# EAGLE board SM2000 (EAGLE 6.5.0)
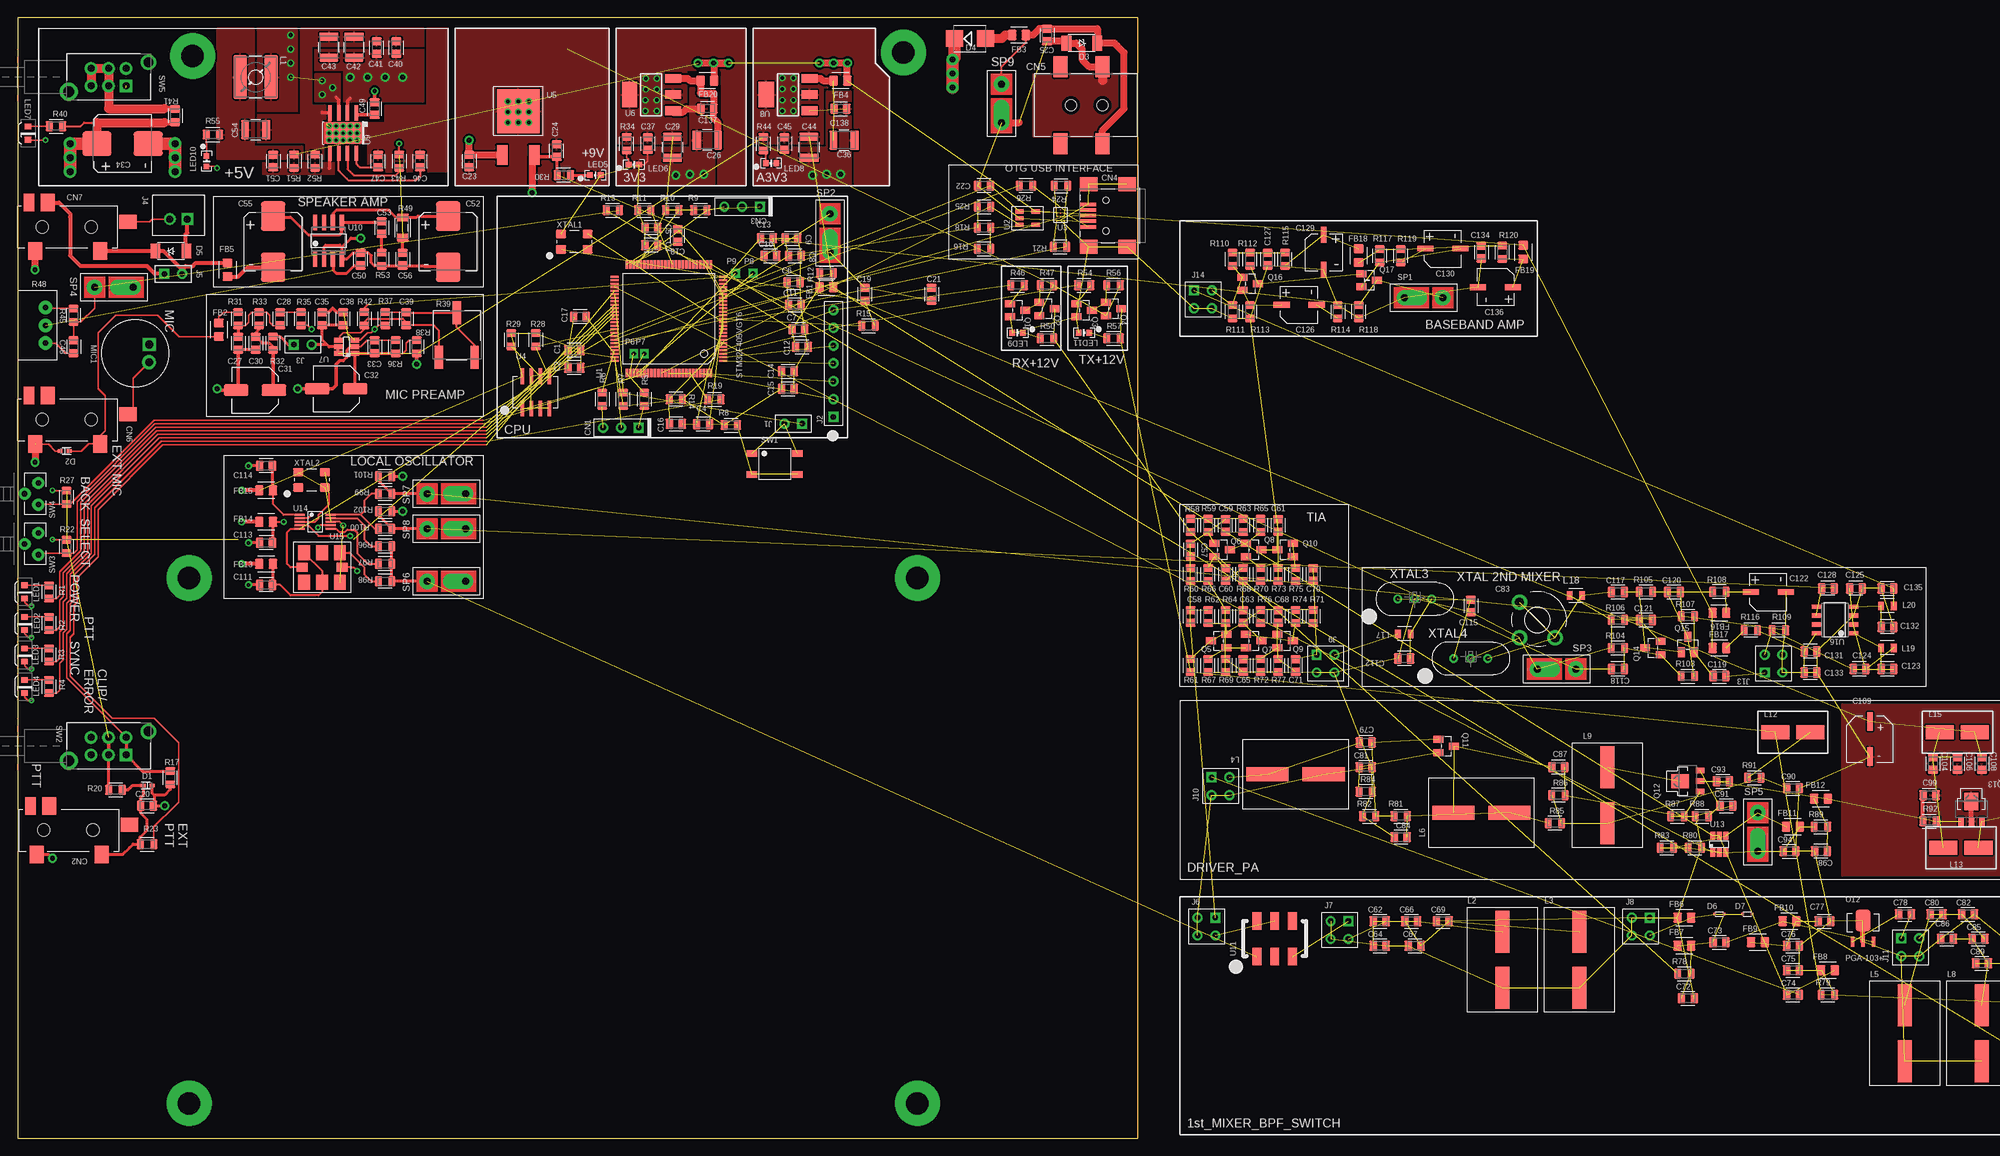
[diagram p0: board, top side]
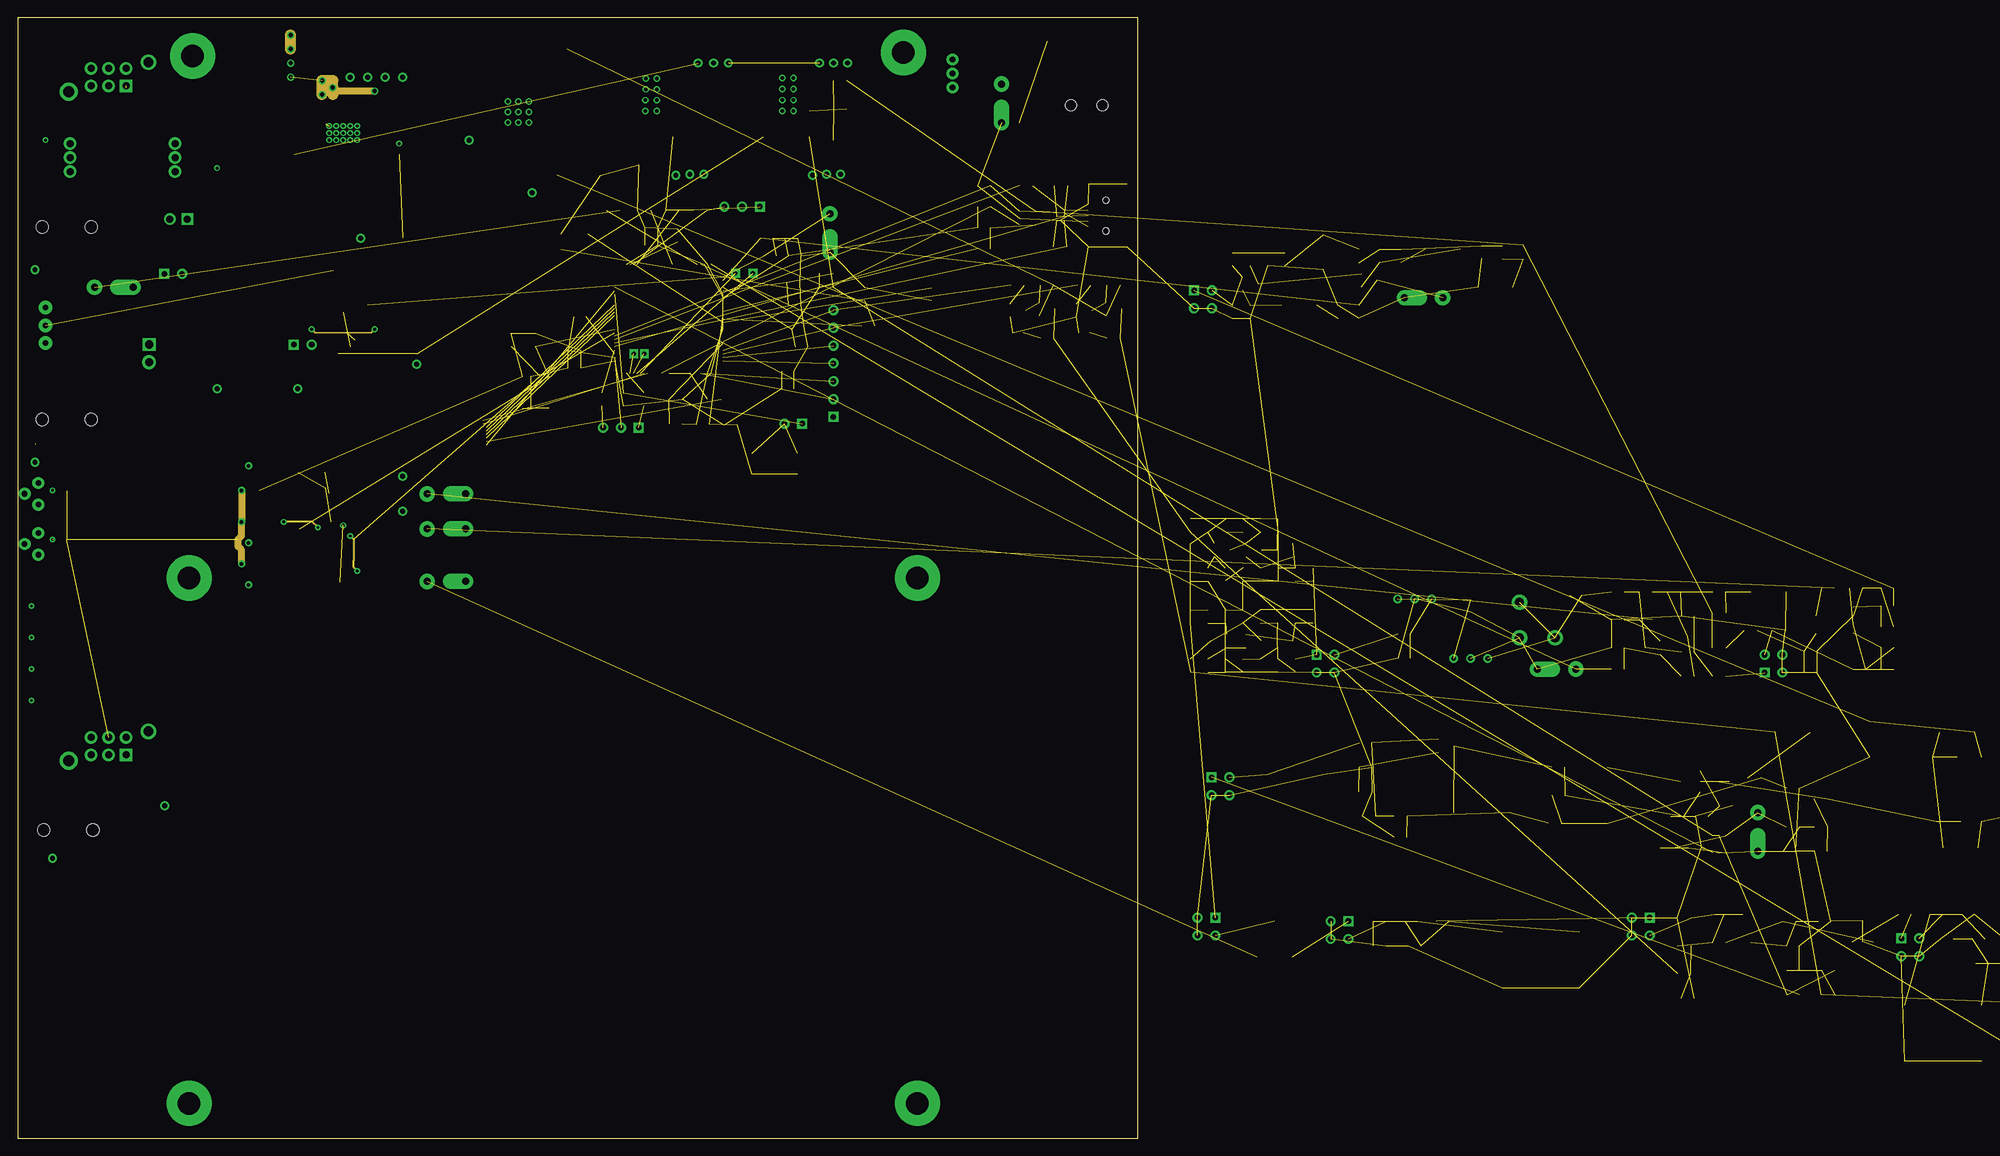
[diagram p1: board, inner layer L2-BOTTOM]
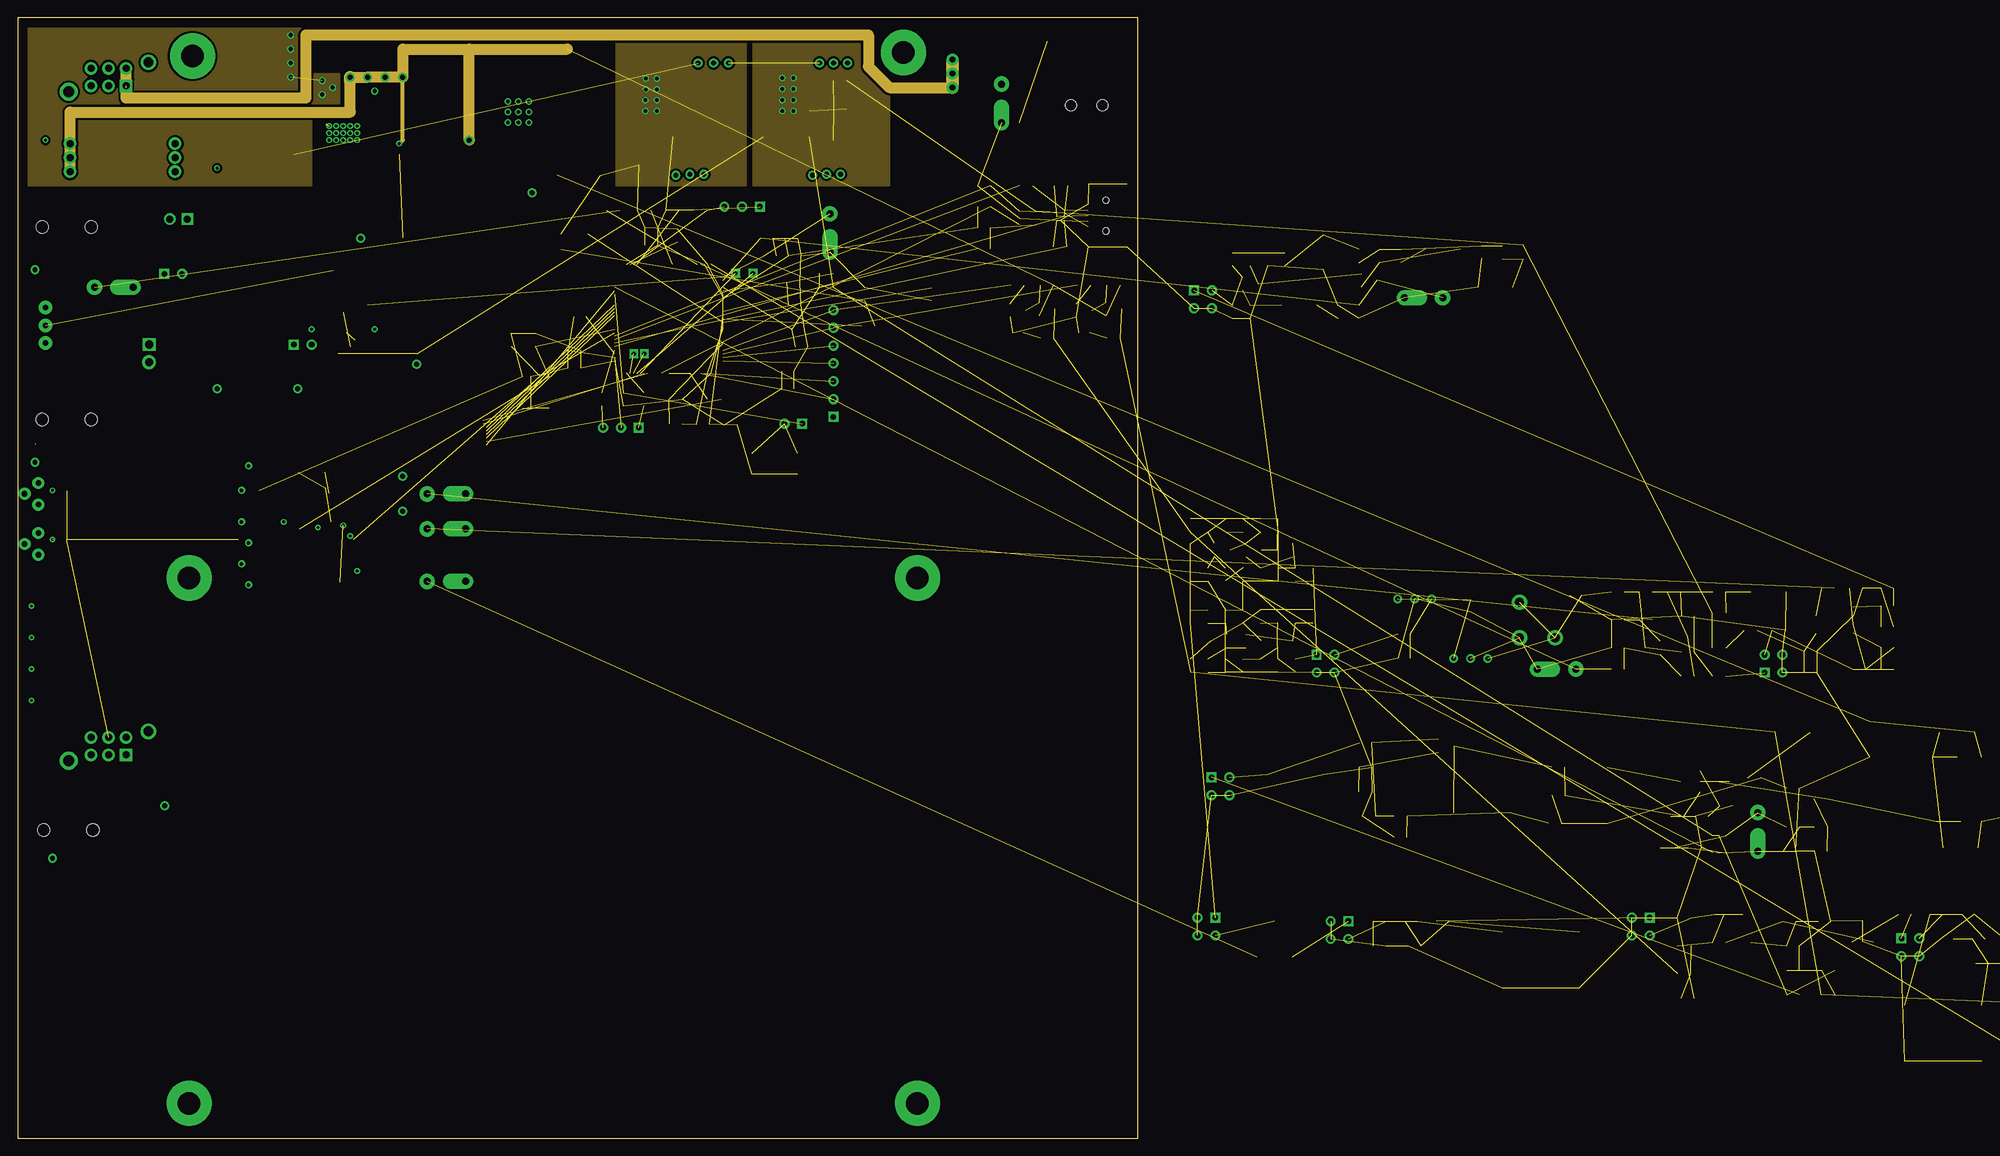
[diagram p2: board, inner layer L3-VDD]
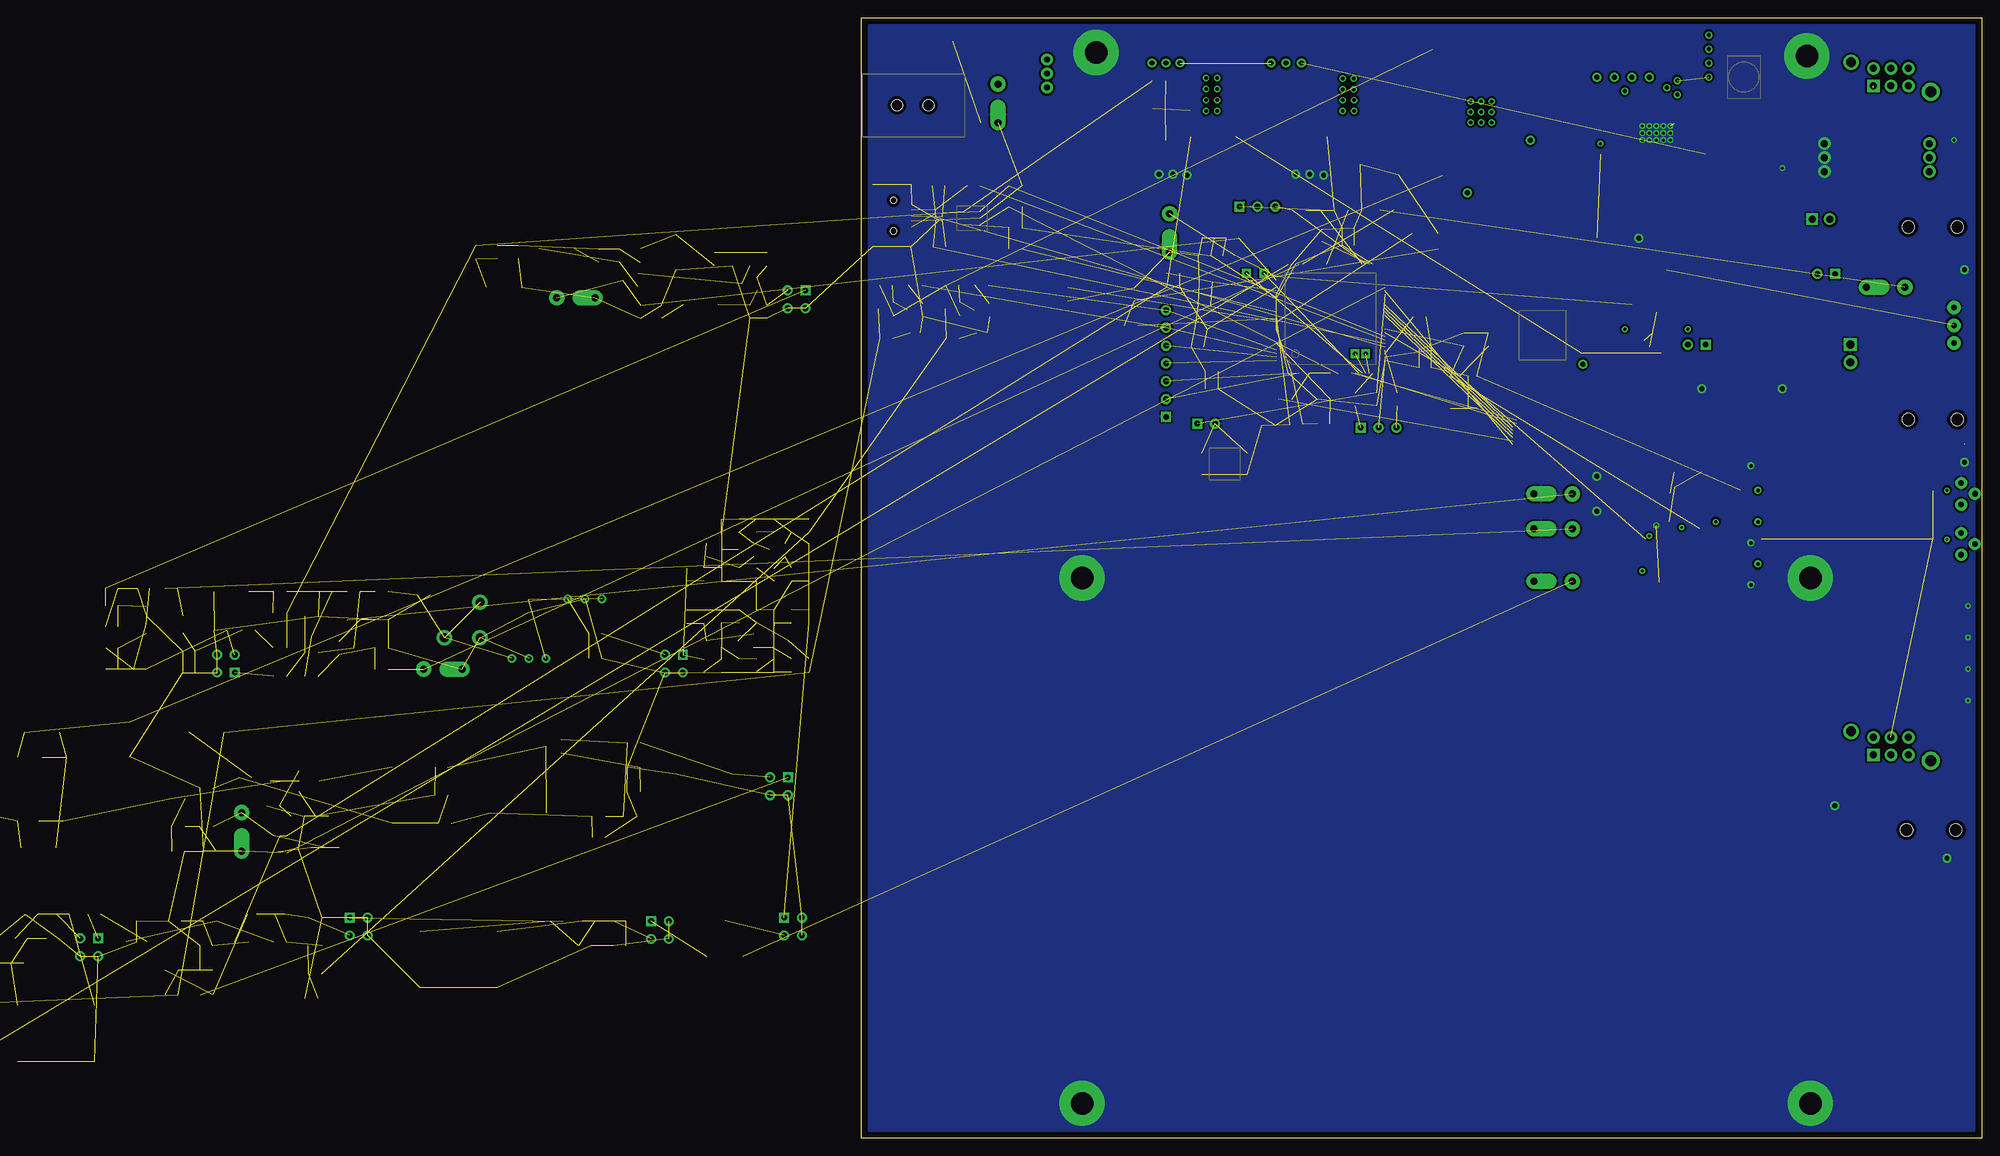
[diagram p3: board, bottom side, seen from below]

Size 160 x 160 mm. Coordinates in mm from the lower left corner, seen from the top.
Outline: 0,0 160,0 160,160 0,160 0,0
Copper layers (1*2+3*16): L1-TOP 0.035mm / dielectric 0.25mm / L2-BOTTOM 0.035mm / dielectric 1mm / L3-VDD 0.035mm / dielectric 0.25mm / L4-GND 0.035mm
Design rules "default *": minimum track width 0.2mm, minimum drill 0.4mm, track to track 0.2mm, track to pad 0.2mm, pad to pad 0.2mm, via to via 0.2mm, smd to smd 0.2mm, copper to edge 0.5mm, drill to drill 0.15mm, minimum pad ring 0.25mm, minimum via ring 0.2mm, stop-mask expansion 0.1mm, vias tented up to drill 0mil, thermal gap 0.25mm

## Footprints (pad centres in the part's own frame; a part is rotated, then mirrored left to right if it is on the bottom)
C0805 = smd 1.15 x 1.45: 1 -0.9,0; 2 0.9,0
C1210 = smd 1.15 x 2.7: 1 -1.5,0; 2 1.5,0
NICHICON-WX-6.3 = smd 1.6 x 3.5: 1 0,2.7; 2 0,-2.7
CAP-CHEMI-HA0 = smd 3.5 x 4.2: 1 0,3.65; 2 0,-3.65
TRIMCAP_VAR_2222_V = drill 1.3 pad 2.184: R1 -2.54,2.54; R2 2.54,-2.54; S -2.54,-2.54
CAP-CHEMI-F80 = smd 0.8 x 2.65: 1 0,2.5; 2 0,-2.5
NICHICON-WJ-5 = smd 0.8 x 2.3: 1 0,2.5; 2 0,-2.5
HDR100-3 = drill 0.8 pad 1.422 square: 1 0,0 | drill 0.8 pad 1.422: 2 2.54,0; 3 5.08,0
ST-3509 = smd 2 x 2.5: A 4.75,3.45; B 2.95,-3.45; C -4.5,3.45 | smd 2.5 x 2: D -8.5,-0.75 | smd 1.5 x 2.5: F 5.65,-3.45 | hole 1.8: 3.75,0; -3.25,0
JI-MU3-002 = smd 0.5 x 2.3: 1 1.6,-2.85; 2 0.8,-2.85; 3 0,-2.85; 4 -0.8,-2.85; 5 -1.6,-2.85 | smd 2 x 2.5: 6 4.45,-2.75; 7 -4.45,-2.75; 8 4.45,2.75; 9 -4.45,2.75 | hole 0.9: -2.2,-0.25; 2.2,-0.25
DS-0518 = smd 2 x 3: 1 -3,5.5; 2 -3,-5.5; 3 3,-5.5; 4 3,5.5 | hole 1.6: -3,0; 1.5,0
SOD523 = smd 0.7 x 0.5: A 0.7,0; C -0.6,0
SOD128 = smd 1.4 x 2.1: A 2.2,0; C -2.2,0
SMB = smd 2.4 x 2.4: A 2.2,0; C -2.2,0
SC79_INFINEON = smd 0.35 x 0.35: A 0.675,0; C -0.675,0
SOT23 = smd 1 x 1.4: 1 -0.95,-1.1; 2 0.95,-1.1; 3 0,1.1
FE0805 = smd 1.28 x 1.47: 1 -0.975,0; 2 0.975,0
JMPR-2PIN = drill 0.8 pad 1.422 square: 1 0,1.27 | drill 0.8 pad 1.422: 2 0,-1.27
HDR100-7 = drill 0.8 pad 1.422 square: 1 0,0 | drill 0.8 pad 1.422: 2 2.54,0; 3 5.08,0; 4 7.62,0; 5 10.16,0; 6 12.7,0; 7 15.24,0
CONN-BOOM-XH-2A = drill 1 pad 1.676 square: 1 -1.25,0 | drill 1 pad 1.676: 2 1.25,0
JMPR-2X2X.1 = drill 0.8 pad 1.422 square: 1 2.54,0 | drill 0.8 pad 1.422: 2 2.54,-2.54; 3 0,0; 4 0,-2.54
SRR5028 = smd 1.9 x 6.3: 1 -2.2,0; 2 2.2,0
L10X15 = smd 2 x 6: 1 0,4; 2 0,-4
Z15/4 = smd 4 x 2: 1 -2.5,0; 2 2.5,0
L-TDK-MLF2012 = smd 1.2 x 0.8: P$1 0,0.9; P$2 0,-0.9
LTST-S2200K = smd 0.9 x 0.8: A 0,0.95; C 0,-0.95
SML-LX0603SRW = smd 0.8 x 0.8: A 0.75,0; C -0.75,0
CMA-4544PF-W = drill 1.2 pad 1.93: 1 -2,1.27 | drill 1.2 square: 2 -2,-1.27
TPAD50 = drill 0.6 pad 1.27 square: 1 0,0
SOT89 = smd 0.8 x 1.2: 1 -1.499,-1.75; 2 0.001,-1.75; 3 1.499,-1.75 | smd 2 x 2.5: 4 0,1.1
R0805 = smd 1.05 x 1.4: 1 -0.95,0; 2 0.95,0
POT3361 = smd 1.19 x 3.3: 1 -2.54,-3.2; 2 0,3.2; 3 2.54,-3.2
POT-3310C = drill 0.8 pad 1.93: 1 -3.91,-2.54; 2 -3.91,0; 3 -3.91,2.54
R1206 = smd 1.1 x 1.7: 1 -1.45,0; 2 1.45,0
SCOPE_PAD = drill 1 pad 2.184: 1 0,1.5 | drill 1 pad 2.184 offset: 2 0,-4
TS-02B = smd 1.5 x 0.9: 1 -3.25,1.5; 2 3.25,1.5; 3 -3.25,-1.5; 4 3.25,-1.5
SW-LC2259 = drill 1 pad 1.778 square: 1 2.5,-1.25 | drill 1 pad 1.778: 2 0,-1.25; 3 -2.5,-1.25; 4 2.5,1.25; 5 0,1.25; 6 -2.5,1.25 | drill 1.6 pad 2.54: 7 -5.7,-2.1 | drill 1.4 pad 2.184: 8 5.7,2.1
TS-026 = drill 0.8 pad 1.676: 1 -1.55,-0.975; 2 1.55,-0.975; 3 0,0.975
LQFP100-14 = smd 0.3 x 1.2: 1 -6,-7.75; 2 -5.5,-7.75; 3 -5,-7.75; 4 -4.5,-7.75; 5 -4,-7.75; 6 -3.5,-7.75; 7 -3,-7.75; 8 -2.5,-7.75; 9 -2,-7.75; 10 -1.5,-7.75; 11 -1,-7.75; 12 -0.5,-7.75; 13 0,-7.75; 14 0.5,-7.75; 15 1,-7.75; 16 1.5,-7.75; 17 2,-7.75; 18 2.5,-7.75; 19 3,-7.75; 20 3.5,-7.75; 21 4,-7.75; 22 4.5,-7.75; 23 5,-7.75; 24 5.5,-7.75; 25 6,-7.75; 51 6,7.75; 52 5.5,7.75; 53 5,7.75; 54 4.5,7.75; 55 4,7.75; 56 3.5,7.75; 57 3,7.75; 58 2.5,7.75; 59 2,7.75; 60 1.5,7.75; 61 1,7.75; 62 0.5,7.75; 63 0,7.75; 64 -0.5,7.75; 65 -1,7.75; 66 -1.5,7.75; 67 -2,7.75; 68 -2.5,7.75; 69 -3,7.75; 70 -3.5,7.75; 71 -4,7.75; 72 -4.5,7.75; 73 -5,7.75; 74 -5.5,7.75; 75 -6,7.75 | smd 1.2 x 0.3: 26 7.75,-6; 27 7.75,-5.5; 28 7.75,-5; 29 7.75,-4.5; 30 7.75,-4; 31 7.75,-3.5; 32 7.75,-3; 33 7.75,-2.5; 34 7.75,-2; 35 7.75,-1.5; 36 7.75,-1; 37 7.75,-0.5; 38 7.75,0; 39 7.75,0.5; 40 7.75,1; 41 7.75,1.5; 42 7.75,2; 43 7.75,2.5; 44 7.75,3; 45 7.75,3.5; 46 7.75,4; 47 7.75,4.5; 48 7.75,5; 49 7.75,5.5; 50 7.75,6; 76 -7.75,6; 77 -7.75,5.5; 78 -7.75,5; 79 -7.75,4.5; 80 -7.75,4; 81 -7.75,3.5; 82 -7.75,3; 83 -7.75,2.5; 84 -7.75,2; 85 -7.75,1.5; 86 -7.75,1; 87 -7.75,0.5; 88 -7.75,0; 89 -7.75,-0.5; 90 -7.75,-1; 91 -7.75,-1.5; 92 -7.75,-2; 93 -7.75,-2.5; 94 -7.75,-3; 95 -7.75,-3.5; 96 -7.75,-4; 97 -7.75,-4.5; 98 -7.75,-5; 99 -7.75,-5.5; 100 -7.75,-6
SOT23-5L = smd 0.6 x 1.2: 1 0.95,1.15; 2 0,1.15; 3 -0.95,1.15; 4 -0.95,-1.15; 5 0.95,-1.15
ECOPACK-11 = smd 0.25 x 0.25: A2 0,0.75; A3 0.5,0.75; B1 -0.5,0.25; B2 0,0.25; B3 0.5,0.25; C1 -0.5,-0.25; C2 0,-0.25; C3 0.5,-0.25; D1 -0.5,-0.75; D2 0,-0.75; D3 0.5,-0.75
SOIC8 = smd 0.5 x 2.25: 1 -1.9,-2.3; 2 -0.63,-2.3; 3 0.64,-2.3; 4 1.91,-2.3; 5 1.91,2.3; 6 0.64,2.3; 7 -0.63,2.3; 8 -1.9,2.3
DPAK = smd 1.5 x 2.8: 1 -2.3,-3.125; 3 2.3,-3.125 | smd 6.1 x 6.3: 4 0,3.125
SOT223 = smd 1.219 x 2.235: 1 -2.311,-3.099; 2 0,-3.099; 3 2.311,-3.099 | smd 3.6 x 2.2: 4 0,3.099
SOT23-6 = smd 0.7 x 1.2: 1 -0.95,-1.2; 2 0,-1.2; 3 0.95,-1.2; 4 0.95,1.2; 5 0,1.2; 6 -0.95,1.2
PSO-DDA = smd 2.2 x 0.5: 1 -2.875,1.905; 2 -2.875,0.635; 3 -2.875,-0.635; 4 -2.875,-1.905; 5 2.875,-1.905; 6 2.875,-0.635; 7 2.875,0.635; 8 2.875,1.905 | smd 2.95 x 4.9: EP 0,0
SO08 = smd 0.6 x 2.2: 1 -1.905,-2.6; 2 -0.635,-2.6; 3 0.635,-2.6; 4 1.905,-2.6; 5 1.905,2.6; 6 0.635,2.6; 7 -0.635,2.6; 8 -1.905,2.6
ADE-1 = smd 1.27 x 2.54: 1 -2.54,-2.54; 2 0,-2.54; 3 2.54,-2.54; 4 2.54,2.54; 5 0,2.54; 6 -2.54,2.54
DF782 = smd 0.711 x 1.473: 1 -1.499,-1.918; 2 0,-1.918; 3 1.499,-1.918 | smd 2.159 x 3.175: 4 0,1.092
MSOP10 = smd 0.3 x 1.4: 1 -1,-2.2; 2 -0.5,-2.2; 3 0,-2.2; 4 0.5,-2.2; 5 1,-2.2; 6 1,2.2; 7 0.5,2.2; 8 0,2.2; 9 -0.5,2.2; 10 -1,2.2
SI570 = smd 1.7 x 2.15: 1 -2.54,-2.1; 2 0,-2.1; 3 2.54,-2.1; 4 2.54,2.1; 5 0,2.1; 6 -2.54,2.1 | smd 1.545 x 1.3: 7 -2.853,0; 8 2.853,0
SO-08 = smd 0.6 x 1.3: 1 -1.905,-2.65; 2 -0.635,-2.65; 3 0.635,-2.65; 4 1.905,-2.65; 5 1.905,2.65; 6 0.635,2.65; 7 -0.635,2.65; 8 -1.905,2.65
BU-SMA-H = drill 1.27: 1 0,0 | drill 1.778: 2 -2.55,2.55; 3 2.55,2.55; 4 2.55,-2.55; 5 -2.55,-2.55
CTS-405 = smd 1.5 x 1.2: 1 -1.9,-1.1; 2 1.9,-1.1; 3 1.9,1.1; 4 -1.9,1.1
HC49U = drill 0.7 pad 1.2: 1 -2.44,0; 2 -0.027,0; 3 2.44,0

## Placement (x,y rotation side)
C1  100nF,25V  [C0805]  79.5,112.5 180 top
C2  10nF,25V  [C0805]  79.5,110 180 top
C3  100nF,25V  [C0805]  90.5,127.5 180 top
C4  100nF,25V  [C0805]  97.89,101.96 180 top
C5  10nF,25V  [C0805]  90.5,130 180 top
C6  1uF,25V  [C0805]  110.81,122.23 0 top
C7  1uF,25V  [C0805]  111.5,115.5 0 top
C8  100nF,25V  [C0805]  111,126 0 top
C9  10nF,25V  [C0805]  110.5,128.5 0 top
C10  1nF,25V  [C0805]  107.5,126 0 top
C11  100nF,25V  [C0805]  111,119 0 top
C12  100nF,25V  [C0805]  112,113 0 top
C13  1nF,25V  [C0805]  107,128.5 0 top
C14  100nF,25V  [C0805]  110,109.5 0 top
C15  10nF,25V  [C0805]  110,107 0 top
C16  1uF,25V  [C0805]  94,102 0 top
C17  2.2uF,25V  [C0805]  80.31,117.27 180 top
C18  2.2uF,25V  [C0805]  94.27,128.88 90 top
C19  20pF,50V  [C0805]  121,120.5 90 top
C20  100nF,25V  [C0805]  18.5,47.5 0 top
C21  20pF,50V  [C0805]  130.5,120.5 270 top
C22  4.7uF,25V  [C0805]  138,136 180 top
C23  .33uF,25V  [C0805]  64.5,139.5 270 top
C24  100nF,25V  [C0805]  77,141 90 top
C25  10nF,25V  [C0805]  147,157.5 270 top
C26  22uF,25V  [C1210]  98.5,142.5 180 top
C27  1nF,25V  [C0805]  31.5,113.5 270 top
C28  220nF,25V  [C0805]  37.5,117 90 top
C29  22uF,25V  [C1210]  93.5,141.5 270 top
C30  100nF,25V  [C0805]  34,113.5 270 top
C31  100uF,6.3V,EL  [NICHICON-WX-6.3]  33.91,106.81 270 top
C32  100uF,6.3V,EL  [NICHICON-WX-6.3]  45.5,107 270 top
C33  100nF,25V  [C0805]  51,113 270 top
C34  220uF,25V  [CAP-CHEMI-HA0]  15,142 90 top
C35  100nF,25V  [C0805]  43.5,117 90 top
C36  22uF,25V  [C1210]  118,142.5 0 top
C37  100nF,25V  [C0805]  90,142 270 top
C38  2.2uF,25V  [C0805]  46.5,117 90 top
C39  100pF,50V  [C0805]  55.5,117 270 top
C40  1nF,25V  [C0805]  54.1,155.7 90 top
C41  100nF,25V  [C0805]  51.3,155.7 90 top
C42  22uF,25V  [C1210]  48.07,155.77 90 top
C43  22uF,25V  [C1210]  44.47,155.77 90 top
C44  22uF,25V  [C1210]  113,141.5 270 top
C45  100nF,25V  [C0805]  109.5,142 270 top
C46  470nF,25V  [C0805]  57.5,139.5 90 top
C47  8.2nF,25V  [C0805]  51.5,139.5 90 top
C48  100nF,25V  [C0805]  8,113 270 top
C49  100nF,25V  [C0805]  51,147 90 top
C50  3.9nF,25V  [C0805]  49,125.5 90 top
C51  20pF,50V  [C0805]  36.5,139.5 270 top
C52  220uF,25V  [CAP-CHEMI-HA0]  61.5,128 0 top
C53  47nF,25V  [C0805]  52,130 270 top
C54  22uF,25V  [C1210]  34,144 0 top
C55  220uF,25V  [CAP-CHEMI-HA0]  36.5,128 0 top
C56  100nF,25V  [C0805]  55,125.5 270 top
C57  100nF,25V  [C0805]  167.5,84 270 top  (outside the outline)
C58  100nF,25V  [C0805]  167.5,74.5 90 top  (outside the outline)
C59  100nF,25V  [C0805]  172.5,87.5 90 top  (outside the outline)
C60  100nF,25V  [C0805]  172.5,80.5 270 top  (outside the outline)
C61  100nF,25V  [C0805]  180,87.5 270 top  (outside the outline)
C62  3.3pF,50V  [C0805]  194.5,31 0 top  (outside the outline)
C63  100nF,25V  [C0805]  175,74.5 90 top  (outside the outline)
C64  12pF,50V  [C0805]  194.5,27.5 0 top  (outside the outline)
C65  100nF,25V  [C0805]  175,67.5 270 top  (outside the outline)
C66  0.5pF,50V  [C0805]  199,31 0 top  (outside the outline)
C67  12pF,50V  [C0805]  199.5,27.5 0 top  (outside the outline)
C68  100nF,25V  [C0805]  180,74.5 270 top  (outside the outline)
C69  3.3pF,50V  [C0805]  203.5,31 0 top  (outside the outline)
C70  100nF,25V  [C0805]  185,80.5 270 top  (outside the outline)
C71  100nF,25V  [C0805]  182.5,67.5 90 top  (outside the outline)
C72  1nF,25V  [C0805]  238.5,20 0 top  (outside the outline)
C73  1nF,25V  [C0805]  243,28 0 top  (outside the outline)
C74  1nF,25V  [C0805]  253.5,20.5 0 top  (outside the outline)
C75  1nF,25V  [C0805]  253.5,24 0 top  (outside the outline)
C76  1nF,25V  [C0805]  253.5,27.5 0 top  (outside the outline)
C77  1uF,25V  [C0805]  258,31 0 top  (outside the outline)
C78  1nF,25V  [C0805]  269.5,32 0 top  (outside the outline)
C79  22pF,50V  [C0805]  192.5,56.5 180 top  (outside the outline)
C80  3.3pF,50V  [C0805]  274,32 0 top  (outside the outline)
C81  1nF,25V  [C0805]  192.5,53 0 top  (outside the outline)
C82  12pF,50V  [C0805]  278.5,32 0 top  (outside the outline)
C83  2-12pF  [TRIMCAP_VAR_2222_V]  217,74 0 top  (outside the outline)
C84  100nF,25V  [C0805]  197.5,43 180 top  (outside the outline)
C85  0.5pF,50V  [C0805]  280,28.5 0 top  (outside the outline)
C86  12pF,50V  [C0805]  275.5,28.5 0 top  (outside the outline)
C87  5.6pF,50V  [C0805]  220,53 180 top  (outside the outline)
C89  3.3pF,50V  [C0805]  280.5,25 0 top  (outside the outline)
C90  100nF,25V  [C0805]  253.5,50 0 top  (outside the outline)
C91  1nF,25V  [C0805]  244,47.5 0 top  (outside the outline)
C92  22pF,50V  [C0805]  285.5,25 0 top  (outside the outline)
C93  22pF,50V  [C0805]  243.5,51 0 top  (outside the outline)
C94  100nF,25V  [C0805]  253,41 0 top  (outside the outline)
C95  22pF,50V  [C0805]  285.5,32 0 top  (outside the outline)
C96  1nF,25V  [C0805]  300.5,22 0 top  (outside the outline)
C97  1nF,25V  [C0805]  300.5,3 0 top  (outside the outline)
C98  1nF,25V  [C0805]  257.5,41 180 top  (outside the outline)
C99  1nF,25V,DNL  [C0805]  273,49 0 top  (outside the outline)
C100  1nF,25V  [C0805]  302.5,28.5 0 top  (outside the outline)
C101  1pF,50V  [C0805]  300.5,7 0 top  (outside the outline)
C102  1nF,25V  [C0805]  289.5,47 0 top  (outside the outline)
C103  1nF,25V  [C0805]  300.5,18.5 0 top  (outside the outline)
C104  100nF,25V  [C0805]  273.5,53.5 270 top  (outside the outline)
C105  33pF,50V  [C0805]  297.5,46 0 top  (outside the outline)
C106  1nF,25V  [C0805]  277,53.5 270 top  (outside the outline)
C107  47pF,50V  [C0805]  300.5,50 270 top  (outside the outline)
C108  100nF,25V  [C0805]  280.5,53.5 270 top  (outside the outline)
C109  100uF,25V,EL  [CAP-CHEMI-F80]  264.5,57 0 top  (outside the outline)
C110  33pF,50V  [C0805]  309,50.5 0 top  (outside the outline)
C111  100nF,25V  [C0805]  35.5,79 180 top
C112  39pF,50V  [C0805]  198,68.5 180 top  (outside the outline)
C113  100nF,25V  [C0805]  35.5,85 180 top
C114  100nF,25V  [C0805]  35.5,96 180 top
C115  5.6pF,50V  [C0805]  207.5,76 270 top  (outside the outline)
C117  100nF,25V  [C0805]  228.5,78 0 top  (outside the outline)
C118  100nF,25V  [C0805]  228.5,67 180 top  (outside the outline)
C119  100nF,25V  [C0805]  243,66 0 top  (outside the outline)
C120  100nF,25V  [C0805]  236.5,78 0 top  (outside the outline)
C121  100nF,25V  [C0805]  232.5,74 0 top  (outside the outline)
C122  10uF,25V,EL  [NICHICON-WJ-5]  250,78 90 top  (outside the outline)
C123  27pF,50V  [C0805]  267,67 180 top  (outside the outline)
C124  150pF,50V  [C0805]  263,67 180 top  (outside the outline)
C125  100nF,25V  [C0805]  262.5,78.5 180 top  (outside the outline)
C126  10uF,25V,EL  [NICHICON-WJ-5]  183,119 90 top  (outside the outline)
C127  100nF,25V  [C0805]  178.5,125.5 270 top  (outside the outline)
C128  150pF,50V  [C0805]  258.5,78.5 180 top  (outside the outline)
C129  10uF,25V,EL  [NICHICON-WJ-5]  186.5,126.5 0 top  (outside the outline)
C130  10uF,25V,EL  [NICHICON-WJ-5]  203.5,127 90 top  (outside the outline)
C131  1nF,25V  [C0805]  256,69.5 180 top  (outside the outline)
C132  1nF,25V  [C0805]  267,73 180 top  (outside the outline)
C133  100nF,25V  [C0805]  256,66.5 180 top  (outside the outline)
C134  100nF,25V  [C0805]  209,126.5 270 top  (outside the outline)
C135  1nF,25V  [C0805]  267,78.5 0 top  (outside the outline)
C136  10uF,25V,EL  [NICHICON-WJ-5]  211,121.5 270 top  (outside the outline)
C137  100nF,25V  [C0805]  98.5,147 180 top
C138  100nF,25V  [C0805]  117.5,147 0 top
CN1  HDR100-3  [HDR100-3]  88.69,101.45 180 top
CN2  ST-3509  [ST-3509]  7.5,44 180 top
CN3  HDR100-3  [HDR100-3]  106,133 180 top
CN4  JS-MU3-002  [JI-MU3-002]  155.68,131.72 270 top
CN5  DS-0518  [DS-0518]  151.93,147.48 180 top
CN6  ST-3509  [ST-3509]  7.28,102.59 180 top
CN7  ST-3509  [ST-3509]  7.28,130.12 180 top
D1  DNL  [SOD523]  18.54,50.4 0 top
D2  DNL  [SOD523]  6.77,98.1 180 top
D3  PTVS20VP1UP  [SOD128]  151.97,156.34 180 top
D4  B330B  [SMB]  136,157 0 top
D5  DNL  [SOD128]  21.91,126.66 0 top
D6  BAR64-02V  [SC79_INFINEON]  243,32 0 top  (outside the outline)
D7  BAR64-02V  [SC79_INFINEON]  247,32 0 top  (outside the outline)
D8  BAR64-02V  [SC79_INFINEON]  285,28 0 top  (outside the outline)
D9  BAR64-02V  [SC79_INFINEON]  296.5,22 0 top  (outside the outline)
D10  BAT18  [SOT23]  305.5,5 0 top  (outside the outline)
FB1  FB0805  [FE0805]  115.5,121.5 180 top
FB2  FB0805  [FE0805]  28.75,115.43 90 top
FB3  FB0805  [FE0805]  143,157.5 180 top
FB4  FB0805  [FE0805]  117.5,151 180 top
FB5  FB0805  [FE0805]  30,124 90 top
FB6  FB0805  [FE0805]  238,31.5 0 top  (outside the outline)
FB7  FB0805  [FE0805]  238,27.5 0 top  (outside the outline)
FB8  FB0805  [FE0805]  258.5,24 0 top  (outside the outline)
FB9  FB0805  [FE0805]  248.5,28 0 top  (outside the outline)
FB10  FB0805  [FE0805]  253,31 0 top  (outside the outline)
FB11  FB0805  [FE0805]  253.5,44.5 0 top  (outside the outline)
FB12  FB0805  [FE0805]  257.5,48.5 0 top  (outside the outline)
FB13  FB0805  [FE0805]  35.5,82 0 top
FB14  FB0805  [FE0805]  35.5,88 0 top
FB15  FB0805  [FE0805]  35.5,92.5 0 top
FB16  FB0805  [FE0805]  243,75 180 top  (outside the outline)
FB17  FB0805  [FE0805]  243,70 0 top  (outside the outline)
FB18  FB0805  [FE0805]  191.5,126 270 top  (outside the outline)
FB19  FB0805  [FE0805]  215,126.5 90 top  (outside the outline)
FB20  FB0805  [FE0805]  98.5,151 180 top
J1  JMP-2PIN  [JMPR-2PIN]  110.77,102.02 270 top
J2  HDR100-7  [HDR100-7]  116.5,103 90 top
J3  JMP-2PIN  [JMPR-2PIN]  40.73,113.32 90 top
J4  CONN-BOOM-XH-2A  [CONN-BOOM-XH-2A]  23,131.23 180 top
J5  JMP-2PIN  [JMPR-2PIN]  22.23,123.4 90 top
J6  JMPR-2X2  [JMPR-2X2X.1]  168.5,31.5 0 top  (outside the outline)
J7  JMPR-2X2  [JMPR-2X2X.1]  187.5,31 0 top  (outside the outline)
J8  JMPR-2X2  [JMPR-2X2X.1]  230.5,31.5 0 top  (outside the outline)
J9  JMPR-2X2  [JMPR-2X2X.1]  185.5,66.5 90 top  (outside the outline)
J10  JMPR-2X2  [JMPR-2X2X.1]  170.5,49 90 top  (outside the outline)
J11  JMPR-2X2  [JMPR-2X2X.1]  269,26 90 top  (outside the outline)
J12  JMPR-2X2  [JMPR-2X2X.1]  314,51.5 90 top  (outside the outline)
J13  JMPR-2X2  [JMPR-2X2X.1]  252,66.5 180 top  (outside the outline)
J14  JMPR-2X2  [JMPR-2X2X.1]  168,118.5 90 top  (outside the outline)
L1  4.2uH  [SRR5028]  34,151.5 180 top
L2  68nH  [L10X15]  212,25.5 0 top  (outside the outline)
L3  68nH  [L10X15]  223,25.5 0 top  (outside the outline)
L4  57nH  [L10X15]  182.5,52 90 top  (outside the outline)
L5  68nH  [L10X15]  269.5,15 0 top  (outside the outline)
L6  168nH  [L10X15]  209,46.5 270 top  (outside the outline)
L8  68nH  [L10X15]  280.5,15 0 top  (outside the outline)
L9  54nH  [L10X15]  227,49 180 top  (outside the outline)
L10  53nH 3T 5mm ID  [L10X15]  294,25.5 0 top  (outside the outline)
L11  220nH  [L10X15]  313,24 0 top  (outside the outline)
L12  RFC  [Z15/4]  253.5,58 0 top  (outside the outline)
L13  RFC  [Z15/4]  277.5,41.5 0 top  (outside the outline)
L14  57nH  [L10X15]  293.5,50 180 top  (outside the outline)
L15  RFC  [Z15/4]  277,58 0 top  (outside the outline)
L16  57nH  [L10X15]  304,54 90 top  (outside the outline)
L17  5.7uH  [L-TDK-MLF2012]  198,72 90 top  (outside the outline)
L18  L-TDK-MLF-2012-9.2uH  [L-TDK-MLF2012]  222.5,77.5 270 top  (outside the outline)
L19  5.2uH  [L-TDK-MLF2012]  267,70 90 top  (outside the outline)
L20  15uH,TDK,MLF  [L-TDK-MLF2012]  267,76 90 top  (outside the outline)
LED1  LTST-S220KGKT  [LTST-S2200K]  1,78 0 top
LED2  LTST-S220KRKT  [LTST-S2200K]  1,73.5 0 top
LED3  LTST-S220KGKT  [LTST-S2200K]  1,69 0 top
LED4  LTST-S220KRKT  [LTST-S2200K]  1,64.5 0 top
LED5  SML-LX0603GW  [SML-LX0603SRW]  82.5,137.5 180 top
LED6  SML-LX0603GW  [SML-LX0603SRW]  88,139 180 top
LED7  LTST-S220KGKT  [LTST-S2200K]  1.5,143.5 0 top
LED8  SML-LX0603GW  [SML-LX0603SRW]  107.6,139.2 180 top
LED9  SML-LX0603SRW  [SML-LX0603SRW]  142.8,115 0 top
LED10  SML-LX0603GW  [SML-LX0603SRW]  27,139.5 90 top
LED11  SML-LX0603YW  [SML-LX0603SRW]  152.3,115 0 top
MIC1  CMA-4544PF-W  [CMA-4544PF-W]  16.8,112.06 180 top
P6  TPAD50  [TPAD50]  88,112 0 top
P7  TPAD50  [TPAD50]  89.5,112 0 top
P8  TPAD50  [TPAD50]  105,123.5 0 top
P9  TPAD50  [TPAD50]  102.5,123.5 0 top
PCB1  SM2000A  [NOPACKAGE]  -0.94,1.35 0 top
Q1  MMBT3904  [SOT23]  142.8,118.2 270 top
Q2  STR2P3LLH6  [SOT23]  147,118.4 270 top
Q3  MMBT3904  [SOT23]  152.3,118.2 270 top
Q4  STR2P3LLH6  [SOT23]  156.5,118.4 270 top
Q5  MMBT3904  [SOT23]  171.5,71 90 top  (outside the outline)
Q6  MMBT3904  [SOT23]  172,84 270 top  (outside the outline)
Q7  MMBT3904  [SOT23]  176.5,71 270 top  (outside the outline)
Q8  MMBT3904  [SOT23]  176.5,84 270 top  (outside the outline)
Q9  MMBT3904  [SOT23]  181,71 270 top  (outside the outline)
Q10  MMBT3904  [SOT23]  181,84 90 top  (outside the outline)
Q11  BFR92  [SOT23]  204,56 270 top  (outside the outline)
Q12  BFQ19  [SOT89]  238.5,51 90 top  (outside the outline)
Q13  RD01MUS2  [SOT89]  279,47 0 top  (outside the outline)
Q14  MMBT3904  [SOT23]  233.5,70 90 top  (outside the outline)
Q15  MMBT3904  [SOT23]  238.5,70.5 0 top  (outside the outline)
Q16  MMBT3904  [SOT23]  176,122 270 top  (outside the outline)
Q17  MMBT3906  [SOT23]  193,122.5 270 top  (outside the outline)
R1  680,1%  [R0805]  4.5,78 90 top
R2  680,1%  [R0805]  4.5,73.5 90 top
R3  680,1%  [R0805]  4.5,69 90 top
R4  680,1%  [R0805]  4.5,64.5 90 top
R5  22,1%  [R0805]  89.5,105.5 270 top
R6  22,1%  [R0805]  83.5,105.5 270 top
R7  4.7K,1%  [R0805]  86.5,105.5 90 top
R8  4.7K,1%  [R0805]  101.86,101.83 0 top
R9  4.7K,1%  [R0805]  97.5,132.5 0 top
R10  4.7K,1%  [R0805]  93.5,132.5 0 top
R11  1K,1%  [R0805]  89.5,132.5 0 top
R12  47,1%  [R0805]  115.5,123.5 0 top
R13  0 Ohm  [R0805]  85,132.5 0 top
R14  0 Ohm  [R0805]  94,105.5 180 top
R15  220,1%  [R0805]  121.5,116 0 top
R16  0 Ohm  [R0805]  138,127 0 top
R17  10K,1%  [R0805]  21.82,51.49 90 top
R18  10K,1%  [R0805]  138,130 180 top
R19  470,1%  [R0805]  99.5,105.5 0 top
R20  10K,1%  [R0805]  14,49.76 0 top
R21  22,1%  [R0805]  148.85,127.26 0 top
R22  10K,1%  [R0805]  7,84.5 90 top
R23  2.2K,1%  [R0805]  18.5,42 0 top
R24  22,1%  [R0805]  149,136 0 top
R25  47K,1%  [R0805]  138,133 0 top
R26  0 Ohm  [R0805]  144,136 180 top
R27  10K,1%  [R0805]  7,91.5 90 top
R28  4.7K,1%  [R0805]  74,114 270 top
R29  4.7K,1%  [R0805]  70.5,114 270 top
R30  1.5K,1%  [R0805]  78,137.5 180 top
R31  100,1%  [R0805]  31.5,117 270 top
R32  100,1%  [R0805]  36.5,113.5 90 top
R33  2.2K,1%  [R0805]  34.5,117 270 top
R34  330,1%  [R0805]  87,142 90 top
R35  2.2K,1%  [R0805]  40.5,117 270 top
R36  2.2K,1%  [R0805]  54,113 90 top
R37  2.2K,1%  [R0805]  52.5,117 90 top
R38  2.2K,1%  [R0805]  57,113 270 top
R39  500K,TrimPOT  [POT3361]  62.72,114.68 0 top
R40  330,1%  [R0805]  5.5,144.5 0 top
R41  0 Ohm  [R0805]  22.5,146 270 top
R42  1.5K,1%  [R0805]  49.5,117 270 top
R43  10K,1%  [R0805]  54.5,139.5 270 top
R44  330,1%  [R0805]  106.5,142 90 top
R45  22.1K,1%  [R0805]  8,117.5 90 top
R46  10K,1%  [R0805]  142.8,121.8 0 top
R47  2.2K,1%  [R0805]  147,121.8 0 top
R48  100K,POT  [POT-3310C]  0.1,116.06 180 top
R49  4.7,0.5W,1206  [R1206]  55,130 90 top
R50  1K,1%  [R0805]  147,114.2 0 top
R51  124.0K,1%  [R0805]  39.5,139.5 270 top
R52  22.1K,1%  [R0805]  42.5,139.5 90 top
R53  10,1%  [R0805]  52,125.5 270 top
R54  10K,1%  [R0805]  152.3,121.8 0 top
R55  680,1%  [R0805]  27.9,143.3 0 top
R56  2.2K,1%  [R0805]  156.5,121.8 0 top
R57  1K,1%  [R0805]  156.5,114.2 0 top
R58  10,1%  [R0805]  167.5,87.5 270 top  (outside the outline)
R59  10K,1%  [R0805]  170,87.5 90 top  (outside the outline)
R60  2.2K,1%  [R0805]  167.5,80.5 90 top  (outside the outline)
R61  10,1%  [R0805]  167.5,67.5 90 top  (outside the outline)
R62  47,1%  [R0805]  170,74.5 90 top  (outside the outline)
R63  680,1%  [R0805]  175,87.5 90 top  (outside the outline)
R64  470,1%  [R0805]  172.5,74.5 270 top  (outside the outline)
R65  330,1%  [R0805]  177.5,87.5 270 top  (outside the outline)
R66  180,1%  [R0805]  170,80.5 90 top  (outside the outline)
R67  2.2K,1%  [R0805]  170,67.5 90 top  (outside the outline)
R68  15,1%  [R0805]  175,80.5 90 top  (outside the outline)
R69  15,1%  [R0805]  172.5,67.5 90 top  (outside the outline)
R70  2.2K,1%  [R0805]  177.5,80.5 90 top  (outside the outline)
R71  330,1%  [R0805]  185,74.5 270 top  (outside the outline)
R72  180,1%  [R0805]  177.5,67.5 90 top  (outside the outline)
R73  470,1%  [R0805]  180,80.5 90 top  (outside the outline)
R74  680,1%  [R0805]  182.5,74.5 270 top  (outside the outline)
R75  47,1%  [R0805]  182.5,80.5 270 top  (outside the outline)
R76  10K,1%  [R0805]  177.5,74.5 90 top  (outside the outline)
R77  2.2K,1%  [R0805]  180,67.5 90 top  (outside the outline)
R78  18K,1%  [R0805]  238,23.5 0 top  (outside the outline)
R79  18K,1%  [R0805]  258.5,20.5 0 top  (outside the outline)
R80  10K,1%  [R0805]  239.5,41.5 0 top  (outside the outline)
R81  10K,1%  [R0805]  197.5,46 0 top  (outside the outline)
R82  3K,1%  [R0805]  193,46 0 top  (outside the outline)
R83  10K,1%  [R0805]  235.5,41.5 0 top  (outside the outline)
R84  150,1%  [R0805]  192.5,49.5 180 top  (outside the outline)
R85  10,1%  [R0805]  219.5,45 180 top  (outside the outline)
R86  3K,1%  [R0805]  220,49 180 top  (outside the outline)
R87  1K,1%  [R0805]  237,46 0 top  (outside the outline)
R88  49.9,1%  [R0805]  240.5,46 0 top  (outside the outline)
R89  4.7K,1%  [R0805]  257.5,44.5 0 top  (outside the outline)
R90  2.2K,1%  [R0805]  305,18.5 0 top  (outside the outline)
R91  10,1%  [R0805]  248,51.5 0 top  (outside the outline)
R92  47,1%, DNL  [R0805]  273,45.3 0 top  (outside the outline)
R93  330,1%  [R0805]  300.5,11 0 top  (outside the outline)
R94  68K,1%  [R0805]  302,32 0 top  (outside the outline)
R95  10K,1%  [R0805]  305,22 0 top  (outside the outline)
R96  0 Ohm  [R0805]  52.5,84.5 180 top
R97  0 Ohm  [R0805]  52.5,82 180 top
R98  0 Ohm  [R0805]  52.5,79.5 180 top
R99  1K,1%  [R0805]  52.5,92 180 top
R100  1K,1%  [R0805]  52.5,87 180 top
R101  150,1%  [R0805]  52.5,94.5 0 top
R102  150,1%  [R0805]  52.5,89.5 0 top
R103  33K,1%  [R0805]  238.5,66 0 top  (outside the outline)
R104  15K,1%  [R0805]  228.5,70 0 top  (outside the outline)
R105  3K,1%  [R0805]  232.5,78 0 top  (outside the outline)
R106  1K,1%  [R0805]  228.5,74 0 top  (outside the outline)
R107  1K,1%  [R0805]  238.5,74.5 0 top  (outside the outline)
R108  10,1%  [R0805]  243,78 180 top  (outside the outline)
R109  49.9,1%  [R0805]  251.5,72.5 180 top  (outside the outline)
R110  39K,1%  [R0805]  173.5,125.5 90 top  (outside the outline)
R111  18K,1%  [R0805]  173.5,118 90 top  (outside the outline)
R112  2.2K,1%  [R0805]  176,125.5 90 top  (outside the outline)
R113  1K,1%  [R0805]  176,118 90 top  (outside the outline)
R114  100,1%  [R0805]  188.5,118 270 top  (outside the outline)
R115  10,1%  [R0805]  181,125.5 90 top  (outside the outline)
R116  150,1%  [R0805]  247.5,72.5 180 top  (outside the outline)
R117  3.3K,1%  [R0805]  194.5,126 90 top  (outside the outline)
R118  3.3K,1%  [R0805]  191.5,118 90 top  (outside the outline)
R119  100,1%  [R0805]  197.5,126 90 top  (outside the outline)
R120  10,1%  [R0805]  212,126.5 90 top  (outside the outline)
SH1  SHUNT,0.1IN  [NOPACKAGE]  -1,0 0 top
SH2  SHUNT,0.1IN  [NOPACKAGE]  -0.96,2.55 0 top
SH3  SHUNT,0.1IN  [NOPACKAGE]  -1.52,4.85 0 top
SP1  SCOPE_PAD  [SCOPE_PAD]  202,120 270 top  (outside the outline)
SP2  SCOPE_PAD  [SCOPE_PAD]  116,130.5 0 top
SP3  SCOPE_PAD  [SCOPE_PAD]  221,67 270 top  (outside the outline)
SP4  SCOPE_PAD  [SCOPE_PAD]  12.5,121.5 90 top
SP5  SCOPE_PAD  [SCOPE_PAD]  248.5,45 0 top  (outside the outline)
SP6  SCOPE_PAD  [SCOPE_PAD]  60,79.5 90 top
SP7  SCOPE_PAD  [SCOPE_PAD]  60,92 90 top
SP8  SCOPE_PAD  [SCOPE_PAD]  60,87 90 top
SP9  SCOPE_PAD  [SCOPE_PAD]  140.5,149 0 top
SW1  TS-02B  [TS-02B]  108.12,96.27 0 top
SW2  SW-LC2259  [SW-LC2259]  13,56 0 top
SW3  TS-026  [TS-026]  2,84.86 90 top
SW4  TS-026  [TS-026]  2,92.01 90 top
SW5  SW-LC2259EENP  [SW-LC2259]  13,151.5 0 top
U1  STM32F405VGT6  [LQFP100-14]  93,117 90 top
U2  STMPS2141  [SOT23-5L]  144.22,131.36 90 top
U3  EMIF02-USB03F2  [ECOPACK-11]  148.92,131.83 0 top
U4  DNL  [SOIC8]  74,106.5 0 top
U5  L78M09  [DPAK]  71.5,143.5 0 top
U6  LD1117AS-33  [SOT223]  90.5,149 90 top
U7  LMV341  [SOT23-6]  47,113 90 top
U8  LD1117AS-33  [SOT223]  110,149 90 top
U9  TPS54329E  [PSO-DDA]  46.5,143.5 270 top
U10  LM386M-1  [SO08]  44.41,128.14 0 top
U11  ADE-1  [ADE-1]  179.5,28.5 0 top  (outside the outline)
U12  PGA-103+  [DF782]  263.5,30 0 top  (outside the outline)
U13  LMV341  [SOT23-6]  243,42 0 top  (outside the outline)
U14  SI5351A  [MSOP10]  42.5,88 270 top
U15  SI570  [SI570]  43.5,81.5 0 top
U16  SA612A  [SO-08]  259.5,74 90 top  (outside the outline)
X1  BU-SMA-H  [BU-SMA-H]  314.5,7 0 top  (outside the outline)
XTAL1  8.000MHz  [CTS-405]  79.5,128 0 top
XTAL2  25.000MHz  [CTS-405]  42,94 0 top
XTAL3  ECS-10.7-15B  [HC49U]  199.5,77 0 top  (outside the outline)
XTAL4  ECS-10.7-15B  [HC49U]  207.5,68.5 0 top  (outside the outline)

## Library data of the parts
C1-C87 C89-C115 C117-C138 CN2 CN4-CN7 D1-D10 FB1-FB20 J2 J4 J6-J14 L1-L6 L8-L20 LED1-LED11 MIC1 Q1-Q17 R1-R120 SP1-SP9 SW1-SW5 U1 U2 U4-U16 XTAL1 XTAL2 = _RoweTel
CN1 CN3 J1 J3 J5 P6-P9 PCB1 SH1-SH3 = _Coherix
U3 = AA-IC
X1 XTAL3 XTAL4 = _RoweTel; OC_FARNELL: unknown; OC_NEWARK: unknown

## Nets
1ST_LO: R96.1 R97.1 R98.1 SP6.1 U11.1
3V3: C1.1 C2.1 C3.1 C5.1 C8.1 C9.1 C14.1 C15.1 C29.1 C37.1 FB13.1 FB14.1 FB15.1 R7.1 R8.1 R9.1 R10.1 R14.1 R18.2 R20.1 R22.2 R25.1 R27.2 R28.1 R29.1 R34.2 SW2.2 SW2.5 U1.11 U1.19 U1.28 U1.50 U1.75 U1.100 U4.8 U6.2 U6.4
!BACK!: R27.1 SW4.1 U1.82
!BOOT0!: R19.1 U1.88 U1.94
!EXT-PTT!: R23.2 U1.55
!SELECT!: R22.1 SW3.1 U1.81
!TEST!: J1.1 R7.2 U1.56
+5V: C51.1 C54.1 FB4.1 FB16.2 FB17.1 FB19.2 FB20.1 L1.2 R51.1 R55.2 U2.5
+9V: C24.1 C108.1 C109.1 L15.2 R30.2 U5.3
+12VRXENB: J2.7 R46.1 U1.4
+12VTXENB: J2.6 R54.1 U1.3
+VIN: C23.1 C34.1 C40.1 C41.1 C42.1 C43.1 C56.1 Q2.2 Q4.2 R40.2 R41.2 R43.1 R47.2 R49.1 R56.2 U5.1 U9.2
A3V3: C35.1 C38.1 C44.1 C45.1 FB1.1 FB9.2 J3.2 R38.2 R44.2 U7.5 U7.6 U8.2 U8.4 U13.5 U13.6
AIN1: C13.1 Q17.3 R118.2 SP1.1 U1.24
AIN2: C10.1 R42.1 SP2.1 U1.25
AIN3: C97.2 D10.1 U1.26
ANT_SMA: C100.1 C101.2 R94.2 X1.1
BBAMP: C135.2 J14.1 L20.P$2
BOOT1: R11.2 U1.37
DAC2_OUT: C48.1 R13.2 R45.1 SP4.1
DRIVER/PA_INPUT: C74.2 J10.1
GND: C1.2 C2.2 C3.2 C4.2 C5.2 C6.2 C7.2 C8.2 C9.2 C10.2 C11.2 C12.2 C13.2 C14.2 C15.2 C16.2 C17.2 C18.2 C19.2 C20.2 C21.2 C22.2 C23.2 C24.2 C25.2 C26.2 C27.2 C29.2 C30.2 C31.2 C32.2 C33.1 C34.2 C35.2 C36.2 C37.2 C38.2 C40.2 C41.2 C42.2 C43.2 C44.2 C45.2 C46.2 C47.2 C50.2 C52.2 C54.2 C56.2 C61.2 C63.2 C64.2 C67.1 C72.2 C75.2 C76.2 C77.2 C81.2 C82.2 C83.S C84.2 C86.1 C90.2 C91.2 C92.2 C94.2 C95.2 C97.1 C98.2 C99.2 C103.2 C104.2 C105.2 C106.2 C107.2 C108.2 C109.2 C110.2 C111.2 C112.2 C113.2 C114.2 C115.2 C120.2 C122.2 C125.1 C127.2 C129.2 C131.1 C132.1 C133.1 C134.2 C135.1 C136.2 C137.2 C138.2 CN1.2 CN2.A CN3.2 CN4.5 CN4.6 CN4.7 CN4.8 CN4.9 CN5.2 CN6.A CN7.A D1.A D2.A D3.A D5.A D8.C FB6.1 J1.2 J2.1 J4.1 J6.3 J6.4 J7.3 J7.4 J8.3 J8.4 J9.3 J9.4 J10.3 J10.4 J11.3 J11.4 J12.3 J12.4 J13.3 J13.4 J14.3 J14.4 L2.2 L3.2 L4.2 L5.2 L8.2 L18.P$2 LED1.C LED2.C LED3.C LED4.C LED5.C LED6.C LED7.C LED8.C LED9.C LED10.C LED11.C MIC1.2 Q1.2 Q3.2 Q13.2 Q13.4 R11.1 R17.1 R36.2 R45.2 R48.1 R52.2 R53.2 R60.1 R64.1 R66.1 R67.1 R68.1 R69.1 R70.1 R72.1 R73.1 R77.1 R80.2 R82.1 R84.1 R87.1 R88.1 R93.1 R94.1 R95.1 R101.2 R102.2 R104.1 R106.1 R107.1 R109.1 R111.1 R113.1 R114.1 R118.1 SP1.2 SP2.2 SP3.2 SP4.2 SP5.2 SP6.2 SP7.2 SP8.2 SP9.2 SW1.1 SW1.2 SW3.2 SW3.3 SW4.2 SW4.3 U1.10 U1.20 U1.27 U1.74 U1.99 U2.2 U3.D2 U4.1 U4.2 U4.3 U4.4 U4.7 U5.4 U6.1 U7.2 U8.1 U9.4 U9.EP U10.2 U10.4 U12.2 U12.4 U13.2 U14.8 U15.3 U16.3 X1.2 X1.3 X1.4 X1.5 XTAL1.4 XTAL2.2 XTAL2.4 XTAL3.2 XTAL4.2
LED-ERR: R4.1 U1.62
LED-PTT: R2.1 U1.60
LED-PWR: R1.1 U1.59
LED-RT: R3.1 U1.61
MISO: P8.1 U1.79
MOSI: P9.1 U1.80
N$1: C17.1 U1.73
N$2: U14.2
N$3: C18.1 U1.49
N$4: C76.1 C77.1 FB9.1 FB10.2
N$6: CN1.3 R6.2
N$7: CN1.1 R5.2
N$8: C53.1 C55.1 U10.5
N$9: C107.1 L14.2 L16.1
N$10: C19.1 R15.2 XTAL1.1
N$11: C80.2 J11.2
N$13: R13.1 U1.30
N$14: R17.2 R19.2 SW2.1 SW2.4
N$15: C20.1 CN2.C D1.C R20.2 R23.1
N$16: LED1.A R1.2
N$17: LED2.A R2.2
N$18: LED3.A R3.2
N$19: L12.2 R91.1
N$20: LED4.A R4.2
N$21: C62.1 C64.1 C66.2 L2.1
N$22: CN4.3 R24.1 U3.C1
N$23: CN4.2 R21.1 U3.D1
N$24: D4.A FB3.2
N$25: C27.1 C28.1 R31.2 R33.1
N$26: FB2.2 R31.1
N$27: C39.2 R39.1 R42.2 U7.4
N$28: CN4.4 R26.1 U3.A3
N$29: J3.1 R32.2
N$31: R16.2 R18.1 U2.4
N$32: C102.1 L13.2 Q13.3
N$33: C93.1 FB12.2 Q13.1 R92.2
N$34: C48.2 R48.3
N$35: C28.2 R35.1
N$37: C95.1 C100.2 D9.C L10.2
N$38: C94.1 FB11.2 R89.1
N$39: C50.1 R48.2 U10.3
N$40: C119.2 J13.1
N$41: C39.1 R37.2 R39.2 R39.3
N$42: Q1.3 Q2.1 R47.1
N$43: C53.2 R53.1
N$44: C55.2 FB5.1
N$45: C30.1 C31.1 R32.1 R33.2
N$46: C32.1 C33.2 R36.1 R38.1 U7.1
N$47: C114.1 FB15.2 U14.1
N$48: C52.1 R49.2 U10.6
N$49: C123.1 C124.2 J13.2 R109.2
N$50: Q3.3 Q4.1 R56.1
N$51: C124.1 C125.2 L19.P$2 U16.2
N$52: C110.1 J12.1 L16.2
N$53: Q1.1 R46.2
N$54: C36.1 C138.1 FB4.2 U8.3
N$55: Q3.1 R54.2
N$56: C62.2 J7.2
N$57: C101.1 D10.3 R93.2
N$58: J7.1 U11.3
N$59: C78.2 J11.1
N$60: CN6.D MIC1.1
N$61: C78.1 U12.1
N$62: CN7.C D5.C FB5.2 J5.2
N$63: LED5.A R30.1
N$64: CN7.B J5.1
N$65: XTAL2.1
N$66: Q6.3 Q8.1 R63.2 R65.2
N$67: C61.1 Q8.3 Q10.3 R58.1 R59.2 R65.1
N$68: Q8.2 Q10.1 R70.2
N$69: C59.1 R63.1
N$70: C81.1 Q11.2 R84.2
N$71: C91.1 Q12.3 R88.2
N$72: CN7.D J4.2
N$73: C84.1 L6.1 R81.2 R85.2
N$74: C90.1 L9.1 R85.1 R86.2 R91.2
N$75: C87.1 Q12.1 R86.1 R87.2
N$76: CN6.C D2.C FB2.1
N$77: C25.1 CN5.1 D3.C FB3.1 SP9.1
N$78: C79.1 Q11.1 R81.1 R82.2
N$79: C69.1 J8.1
N$80: U14.3 XTAL2.3
N$81: D4.C SW5.1 SW5.4
N$82: C87.2 L6.2 Q11.3
N$83: C57.1 C59.2 Q6.1 R59.1 R60.2
N$84: C93.2 L9.2 Q12.2 Q12.4
N$85: C60.1 Q6.2 R66.2
N$86: C60.2 R68.2
N$87: R35.2 R37.1 U7.3
N$88: Q10.2 R73.2 R75.1
N$89: C70.2 R75.2
N$90: J6.2 U11.5
N$91: Q7.1 Q9.3 R71.2 R74.2
N$92: C63.1 Q5.3 Q7.3 R61.2 R71.1 R76.2
N$93: Q5.1 Q7.2 R67.2
N$94: C68.1 R74.1
N$95: C68.2 C71.1 Q9.1 R76.1 R77.2
N$96: C65.1 Q9.2 R72.2
N$97: C65.2 R69.2
N$98: Q5.2 R62.1 R64.2
N$99: C58.2 R62.2
N$100: C72.1 FB7.2 R78.2
N$101: C126.1 Q16.2 R113.2
N$102: C134.1 FB18.2 R117.2 R119.2 R120.2
N$103: C127.1 R110.2 R112.2 R115.2
N$104: J14.2 Q16.1 R110.1 R111.2
N$105: Q16.3 Q17.1 R112.1
N$106: C130.2 Q17.2 R117.1
N$107: C129.1 FB18.1 R115.1
N$108: C126.2 R114.2
N$109: C130.1 R119.1
N$110: C26.1 C137.1 FB20.2 U6.3
N$111: C136.1 FB19.1 R120.1
N$112: C79.2 J10.2 L4.1
N$113: C99.1 R92.1
N$114: C98.1 FB12.1 R89.2
N$115: C73.1 D6.A FB7.1
N$116: C73.2 FB10.1 U12.3
N$117: C74.1 D7.A FB8.2
N$118: C102.2 C105.1 L14.1
N$119: C111.1 FB13.2 U15.2 U15.6
N$120: C113.1 FB14.2 U14.7
N$121: R96.2 U14.9
N$122: R97.2 U14.6
N$123: R98.2 U15.4
N$124: R99.2 R100.2 U14.10
N$125: C75.1 FB8.1 R79.2
N$126: C66.1 C67.2 C69.2 L3.1
N$127: LED8.A R44.1
N$128: R80.1 R83.1 U13.3
N$130: C104.1 C106.1 L13.1 L15.1
N$131: LED9.A R50.1
N$132: LED6.A R34.1
N$133: LED11.A R57.1
N$134: LED10.A R55.1
N$135: D6.C D7.C FB6.2 J8.2
N$136: C80.1 C82.1 C85.2 L5.1
N$137: C85.1 C86.2 C89.2 L8.1
N$138: LED7.A R40.1
N$140: C120.1 Q15.3 R103.2 R105.2 R108.2
N$141: C117.2 Q14.3 Q15.1 R105.1
N$142: C122.1 FB16.1 R108.1
N$143: C112.1 L17.P$2 XTAL3.3
N$144: C115.1 XTAL3.1 XTAL4.1
N$145: C83.R1 C83.R2 C117.1 L18.P$1 XTAL4.3
N$146: C118.1 Q14.1 R103.1 R104.2
N$147: C121.1 Q14.2 R106.2
N$148: C119.1 Q15.2 R107.2
N$149: C89.1 C92.1 D8.A L10.1
N$150: R41.1 SW5.2 SW5.3 SW5.5 SW5.6
N$151: C123.2 L19.P$1 U16.1
N$152: FB17.2 R116.2
N$153: C131.2 C133.2 R116.1 U16.8
N$154: C128.2 U16.6
N$156: C132.2 L20.P$1 U16.4
N$157: C96.1 D9.A L11.2
N$158: C103.1 L11.1 R90.1 R95.2
N$169: C49.1 U9.1
N$170: C51.2 R51.2 R52.1 U9.5
N$171: C47.1 U9.8
N$172: C46.1 U9.6
N$173: R43.2 U9.7
NRST: C4.1 R8.2 SW1.3 SW1.4 U1.14
NSS: P6.1 U1.77
OSC_IN: C21.1 U1.12 XTAL1.3
OSC_OUT: R15.1 U1.13
OTG_DM: R21.2 U1.70 U3.D3
OTG_DP: R24.2 U1.71 U3.C3
OTG_ID: R26.2 U1.69
OTG_OVR_CUR: R25.2 U1.86 U2.3
OTG_PWR_ON: R16.1 U1.15
PA_OUTPUT: C96.2 J12.2
PE0: J2.2 U1.97
PE1: J2.3 U1.98
PE2: J2.4 U1.1
PE3: J2.5 U1.2
RX+12V: Q2.3 R50.2 R58.2 R78.1
RX-2ND-LO: C128.1 R100.1 R102.1 SP8.1
SCK: P7.1 U1.78
SCL3: R29.2 U1.67 U4.6 U14.4 U15.8
SDA3: R28.2 U1.66 U4.5 U14.5 U15.7
SW: C49.2 L1.1 U9.3
SWCLK: R5.1 U1.76
SWDIO: R6.1 U1.72
TIA_OUT: C70.1 C71.2 J9.1
TIAIN: C57.2 C58.1 J6.1
TIAOUT: J9.2 L17.P$1
TX+12V: L12.1 Q4.3 R57.2 R61.1 R79.1 R90.2
TX-2ND-LO: C121.2 R99.1 R101.1 SP7.1
TX_DAC: C118.2 SP3.1 U1.29
USART3_RX: CN3.3 R9.2 U1.48
USART3_TX: CN3.1 R10.2 U1.47
VBAT: C16.1 R14.2 U1.6
VBUS: C22.1 CN4.1 U1.68 U2.1 U3.B3
VDDA: C7.1 C12.1 FB1.2 R12.1 U1.22
VGG: FB11.1 R83.2 SP5.1 U13.4
VGG_DAC: U1.54 U13.1
VREF+: C6.1 C11.1 R12.2 U1.21

## Tracks (layer width: path | path; a pad name or v marks a point on that pad's centre or on a via)
1ST_LO  (1 unrouted)
  L1-TOP 0.4: SP6.1 R98.1 R97.1 R96.1
3V3  (via drill 0.4 pad 0.8, 0.5 pad 0.8, 0.5 pad 1)  (29 unrouted)
  L1-TOP 0.2: R27.2 5.05,92.45 v5,92.5 | 5.05,85.45 R22.2 7.05,85.5
  L1-TOP 0.4: R20.1 13,49.81 SW2.2
  L1-TOP 0.5: SW2.2 SW2.5
  L1-TOP 0.6: FB13.1 v32,82 | FB14.1 v32,88 | FB15.1 v32,92.5
  L2-BOTTOM 1: v32,82 32,84 31.5,84.5 31.5,85.5 32,86 v32,88 v32,92.5
  other vias: 89.7,151.3 91.3,151.3 89.7,149.75 89.65,148.2 89.65,146.65 91.3,149.75 91.3,148.2 91.3,146.65 5,85.5
  pour L1-TOP (isolate 0.3): 85.5,142 85.5,158.5 104,158.5 104,136 100,136 100,141 100.5,141 100.5,152.5 95.5,152.5 95.5,142
  pour L3-VDD (isolate 0.3): 85.5,158.5 104,158.5 104,136 85.5,136
!BACK!  (1 unrouted)
  L1-TOP 0.2: SW4.1 3.06,90.55 R27.1 7.55,90.55 19.5,102.5 29,102.5 66.5,102.5
!BOOT0!  (2 unrouted)
!EXT-PTT!  (1 unrouted)
  L1-TOP 0.2: R23.2 19.45,44.45 22.5,47.5 23,48 23,55 23,56.5 19.5,60 13.5,60 7.5,66 7.5,71.5 8,72 8,74 8,76 8.5,76.5 8.5,80 11.5,83 11.5,88.5 11.5,89.75 20.6,98.85 20.75,99 29,99 30,99 67,99
!SELECT!  (1 unrouted)
  L1-TOP 0.2: SW3.1 3.21,83.55 R22.1 7.05,83.5 8,83.5 8.5,84 8.5,90.9 19.6,102 29,102 66.5,102
!TEST!  (2 unrouted)
+5V  (via drill 0.7 pad 1.27)  (6 unrouted)
  L1-TOP 1: FB20.1 99.47,153.5 v99.4,153.5 v101.5,153.5 v97.2,153.5 | FB4.1 118.47,153.47 v118.5,153.5 v116.5,153.5 v114.5,153.5
  pour L1-TOP (isolate 0.3): 28.5,158.5 33.8,158.5 33.8,141.6 40.7,141.6 40.7,139.8 28.5,139.8
+9V  (via drill 0.7 pad 1.27)  (3 unrouted)
  L1-TOP 0.4: R30.2 77.05,140.05 C24.1
  L1-TOP 0.5: C24.1 73.8,140.1 U5.3
  L1-TOP 1: U5.3 73.5,140.07 v73.5,135
+12VRXENB  (2 unrouted)
+12VTXENB  (2 unrouted)
+VIN  (via drill 0.4 pad 0.8, 0.7 pad 1.27, 1 pad 1.8)  (5 unrouted)
  L1-TOP 0.25: R40.2 9,144.5 9.5,145 11.35,145 | R43.1 v54.5,142
  L1-TOP 0.4: C56.1 R49.1
  L1-TOP 0.5: U9.2 47.13,148.13 47.5,148.5
  L1-TOP 0.8: R41.2 22.5,145 21,145
  L1-TOP 1: v64.5,142.5 C23.1 69.17,140.4 U5.1
  L1-TOP 1.27: C34.1 11.35,145 21,145
  L1-TOP 1.8: C34.1 v7.5,142 v7.5,140 v7.5,138
  L3-VDD 0.6: v54.5,142 55,142.5 v55,151.5
  L3-VDD 1.6: v7.5,138 7.5,146.5 47.5,146.5 47.5,151 | v47.5,151.5 v50,151.5 v52.5,151.5 v55,151.5 55,155.5 64.5,155.5 | 64.5,155.5 78.5,155.5 | v64.5,142.5 64.5,155.5
  L3-VDD 1.8: 47.5,151 v47.5,151.5
  pour L1-TOP (isolate 0.3, rank 4): 42.4,155.5 58,155.5 58,148 46.6,148 46.6,152.5 42.3,152.5
A3V3  (via drill 0.5 pad 0.8, 0.7 pad 1.27)  (6 unrouted)
  L1-TOP 0.2: R38.2 57.05,112
  L1-TOP 0.4: U7.6 U7.5 44.5,113 44.18,113.32 | 44.18,113.32 J3.2 | C38.1 C35.1 43.5,114 44.18,113.32
  L1-TOP 0.5: 57.05,112 57,111.95 v57,110.5
  other vias: 109.2,151.35 110.8,151.35 109.2,149.8 109.2,148.2 109.2,146.65 110.8,146.65 110.8,148.2 110.8,149.8
  pour L1-TOP (isolate 0.3): 105,142 105,158.5 122.5,158.5 122.5,153.5 124.5,151.5 124.5,136 119.5,136 119.5,150 115,150 115,142
  pour L3-VDD (isolate 0.3): 105,158.5 122.5,158.5 122.5,153.5 124.5,151.5 124.5,136 105,136
AIN1  (4 unrouted)
AIN2  (3 unrouted)
  L1-TOP 0.2: R42.1 49.5,118.5 50,119
AIN3  (2 unrouted)
ANT_SMA  (3 unrouted)
BBAMP  (2 unrouted)
BOOT1  (1 unrouted)
DAC2_OUT  (1 unrouted)
  L1-TOP 0.2: C48.1 R45.1 9.05,116.55 11,118.5 SP4.1
DRIVER/PA_INPUT  (1 unrouted)
GND  (via drill 0.4 pad 0.8, 0.5 pad 1, 0.7 pad 1.27, 1 pad 1.8, 3.2 pad 6.45)  (153 unrouted)
  L1-TOP 0.2: LED10.C 28.5,138.75 v28.5,138.5 | LED6.C 89.5,139 90,139.5 C37.2 | LED1.C 1,76.5 1.5,76 v2,76 | LED2.C 1,72 1.5,71.5 v2,71.5 | LED3.C 1,67.5 1.5,67 v2,67 | LED4.C 1,63 1.5,62.5 v2,62.5 | D2.A 5.4,98.1 4.43,99.07 2.5,99.07 | R45.2 7.95,118.5 7.5,118.5 6,118.5 4.11,118.5 R48.1 | U7.2 49,113 49.9,113.9 C33.1 53.95,113.9 | LED7.C 1.55,142.5 v4,142.5
  L1-TOP 0.3: Q13.4 | v46.5,87.5 46,88 U14.8
  L1-TOP 0.4: U10.2 43.77,127.28 44,127.5 46,127.5 46.31,127.19 | C52.2 61.35,124.5 58,124.5 57.9,124.6 C56.2 52.05,124.6 R53.2 50.95,124.55 50.5,125 50.5,126 50.1,126.4 C50.2 47.9,126.4 47.5,126 47.04,125.54 U10.4 46.31,127.19 | 46.31,127.19 47.63,128.5 v49,128.5 | C30.2 C27.2 | R36.2 53.95,113.9 | U7.2 47.5,113 47,112.5 47,111.5 46.5,111 46,111 | R101.2 v55,94.5 | R102.2 v55,89.5 | C111.2 v33,79 | C113.2 v33,85 | C114.2 v33,96 | CN2.A 4.45,40.55 v5,40 | 19.5,49 19.5,47.6 C20.2 v21,47.5 | R17.1 21.82,49.82 21,49 19.5,49 | 19.5,49 19.24,49.26 D1.A
  L1-TOP 0.5: 44.59,144.5 U9.4 43.5,146.38 43.5,146.5 | 44.59,144.5 v44.5,144.5 v44.5,143.5 v44.5,142.5 v45.5,142.5 | 44.59,144.5 v45.5,144.5 | v47.5,144.5 v46.5,144.5 | v48.5,144.5 v48.5,143.5 v48.5,142.5 v47.5,142.5 | 44,142.2 44,144.8 49,144.8 49,142.2 43.9,142.2 43.9,144.8 | C27.2 31.5,107.1 C31.2 28.69,106.81 v28.5,107 | v40,107 C32.2 45,107 45.5,107.5 45.5,110.5 46,111 | C38.2 45.6,117.9 45,118.5 44.4,117.9 C35.2
  L1-TOP 0.6: D5.A 24,126.77 24,129 24.25,129.25 J4.1
  L1-TOP 0.7: Q13.2 Q13.4
  L1-TOP 1: CN5.2 153.02,152.98 153,153 152,154 152,155.5 151.16,156.34 D3.A 149.51,156.6 C25.2 | SP9.2 143,145 | U6.1 93.5,146.59 93.5,146.5 95,146.5 95.5,147 C137.2 | 2.5,99.07 v2.5,96.5 | v2.5,124 2.53,124.03 CN7.A
  L1-TOP 1.27: CN5.2 154.93,151
  L1-TOP 1.8: C34.2 v22.5,142 v22.5,140 v22.5,138
  other vias: 25,154.5 126.5,155 24.5,5 128.5,5 47.5,143.5 46.5,143.5 46.5,142.5 45.5,143.5 24.5,80 128.5,80 94,137.5 96,137.6 98,137.6 113.5,137.5 115.5,137.6 117.5,137.6
  pour L1-TOP (isolate 0.3, rank 2): 40.4,158.5 58,158.5 58,155.9 42,155.9 42,147.5 44,147.5 44,145.5 43.5,145.5 43.5,145 52.5,145 52.5,147.5 58.5,147.5 58.5,158.5 61.5,158.5 61.5,138 50,138 50,142 43.7,142 43.7,139.5 41.2,139.5 41.2,141.8 33.8,141.8 33.8,146.1 40.4,146.1
  pour L1-TOP (isolate 0.25): 260.5,62 320,62 320,37.5 260.5,37.5
  pour L1-TOP (isolate 0.3, rank 5): 62.5,136 62.5,158.5 84.5,158.5 84.5,136
  pour L1-TOP (isolate 0.3): 85.5,141.5 96,141.5 96,150 99.5,150 99.5,136 85.5,136
  pour L1-TOP (isolate 0.3): 105,141.5 115.5,141.5 115.5,149.5 119,149.5 119,136 105,136
  pour L1-TOP (isolate 0.3): 145,152 160,152 160,143 145.5,143 145,143
  pour L4-GND (isolate 0.3, rank 5): 1,159 159,159 159,1 1,1
LED-ERR  (1 unrouted)
  L1-TOP 0.2: R4.1 5.55,63.55 6,64 6,67.8 6.5,68.3 6.5,72.15 7,72.65 7,76.4 7.5,76.9 7.5,79 7.5,80.5 9,82 10.5,83.5 10.5,84 10.5,90.3 20.15,99.95 20.2,100 20.65,100 29,100 67,100
LED-PTT  (1 unrouted)
  L1-TOP 0.2: R2.1 5.55,72.55 6,73 6,76.8 6.5,77.3 6.5,80 6.5,80.75 6.95,81.2 9.5,83.75 9.5,84 9.5,90.6 19.9,101 29,101 67,101
LED-PWR  (1 unrouted)
  L1-TOP 0.2: R1.1 5.55,77.05 6,77.5 6,80.5 6,80.9 9,83.9 9,90 9,90.8 19.7,101.5 19.75,101.5 29,101.5 67,101.5
LED-RT  (1 unrouted)
  L1-TOP 0.2: R3.1 5.55,68.05 6,68.5 6,72.3 6.5,72.8 6.5,76.6 7,77.1 7,79.5 7,80.6 7.9,81.5 10,83.6 10,84 10,90.45 20.05,100.5 29,100.5 67,100.5
MISO  (1 unrouted)
MOSI  (1 unrouted)
N$1  (1 unrouted)
N$2
  L1-TOP 0.3: 41.9,88.9 41.5,88.5 U14.2
N$3  (1 unrouted)
N$4  (3 unrouted)
N$6  (1 unrouted)
N$7  (1 unrouted)
N$8
  L1-TOP 0.4: C53.1 51.84,130.74 U10.5 46.31,129.31 46,129 41.5,129 39,131.5 36.65,131.5 C55.1
N$9  (2 unrouted)
N$10  (2 unrouted)
N$11  (1 unrouted)
N$13  (1 unrouted)
N$14  (1 unrouted)
  L1-TOP 0.2: SW2.4 7,65.75 7,67.26 7,72 7.5,72.5 7.5,76 7.5,76.25 7.75,76.5 8,76.75 8,77 8,79 8,80.35 9.55,81.9 11,83.35 11,83.5 11,88 11,90 20.5,99.5 29,99.5 67,99.5
  L1-TOP 0.4: R17.2 17.81,52.44 SW2.1 SW2.4
N$15
  L1-TOP 0.4: CN2.C 15.05,40.55 16,41.5 16.5,42 R23.1 17.5,42.05 17.5,43 18.5,44 18.5,45.5 17.6,46.4 C20.1 17.6,48.6 18,49 18,50.34 D1.C 16.4,50.4 16,50 15.76,49.76 R20.2
N$16
  L1-TOP 0.2: LED1.A R1.2
N$17
  L1-TOP 0.2: LED2.A R2.2
N$18
  L1-TOP 0.2: LED3.A R3.2
N$19  (1 unrouted)
N$20
  L1-TOP 0.2: LED4.A R4.2
N$21  (3 unrouted)
N$22  (2 unrouted)
N$23  (2 unrouted)
N$24
  L1-TOP 1.27: FB3.2 141,157.5 140.5,157 D4.A
N$25
  L1-TOP 0.2: 31.55,116 32.5,116 33,116.5 33,117.5 33.45,117.95 R33.1 35.55,117.95 36,117.5 36,116.5 36.5,116 37.5,116
  L1-TOP 0.4: 31.55,116 R31.2 C27.1 | C28.1 37.5,116
N$26
  L1-TOP 0.2: R31.1 29.45,117.95 29,117.5 28.75,117.25 FB2.2
N$27
  L1-TOP 0.2: 46,114.15 46,114.5 46.5,115 49,115 49.5,115.5 R42.2
  L1-TOP 0.25: R42.2 49.5,116.5 50,117 55,117 55.5,116.5 C39.2 59.4,116.1 59.5,116 60.18,115.32 R39.1
  L1-TOP 0.4: U7.4 46,114.15 | C39.2 55.5,116
N$28  (2 unrouted)
N$29
  L1-TOP 0.4: R32.2 36.55,114.5 37.5,114.5 38.68,113.32 J3.1
N$30  (via drill 0.5 pad 0.8)
  other vias: 71.5,146.5
N$31  (2 unrouted)
N$32  (2 unrouted)
N$33  (3 unrouted)
N$34
  L1-TOP 0.2: R48.3 5.48,113.52 6.9,112.1 C48.2
N$35
  L1-TOP 0.2: 37.55,117.95 R35.1
  L1-TOP 0.4: C28.2 37.55,117.95
N$36  (via drill 0.5 pad 0.8)
  other vias: 70,146.5
N$37  (3 unrouted)
N$38  (2 unrouted)
N$39  (1 unrouted)
  L1-TOP 0.4: U10.3 45.05,123.95 45.5,123.5 47,123.5 48.1,124.6 C50.1
N$40  (1 unrouted)
N$41
  L1-TOP 0.2: 52.55,117.9 C39.1
  L1-TOP 0.3: R39.3 65.26,113.24 63,115.5 62.72,115.78 R39.2 55.52,117.88 C39.1
  L1-TOP 0.4: R37.2 52.55,117.9
N$42  (2 unrouted)
N$43
  L1-TOP 0.4: R53.1 C53.2
N$44
  L1-TOP 0.6: FB5.1 30.02,123 31.5,123 32.85,124.35 C55.2
N$45
  L1-TOP 0.4: R33.2 34.5,115.5 34,115 C30.1 34.1,114.4 35,113.5 36,113.5 36.5,113 R32.1
  L1-TOP 0.5: C31.1 36.5,106.92 R32.1
N$46
  L1-TOP 0.2: 54.05,112 55,112 55.5,112.5 55.5,113 55.5,113.5 55.95,113.95 R38.1
  L1-TOP 0.4: 54.05,112 R36.1 51.05,112.05 C33.2 48.25,112.1 U7.1 C32.1
N$47
  L1-TOP 0.3: U14.1 38,89 36.48,90.53 FB15.2
  L1-TOP 0.4: FB15.2 36.4,92.58 C114.1
N$48
  L1-TOP 0.4: C52.1 57.15,131.65 57,131.5 55.05,131.5 R49.2 54.05,131.45 53,132.5 48.5,132.5 45.5,132.5 45.05,132.04 U10.6
N$49  (3 unrouted)
N$50  (2 unrouted)
N$51  (3 unrouted)
N$52  (2 unrouted)
N$53  (1 unrouted)
N$54  (2 unrouted)
  L1-TOP 1: U8.3 114.69,151.31 115,151 FB4.2
N$55  (1 unrouted)
N$56  (1 unrouted)
N$57  (2 unrouted)
N$58  (1 unrouted)
N$59  (1 unrouted)
N$60
  L1-TOP 0.2: CN6.D 16.5,104.06 16.5,107 16.5,108.49 MIC1.1
N$61  (1 unrouted)
N$62
  L1-TOP 0.5: 16,126.66 16,126.67
  L1-TOP 0.6: CN7.C 16,126.67 | 16,126.66 D5.C 20.84,126.66 21,126.5 23.5,124 | J5.2 23.5,124 | 23.5,124 24,124.5 25,124.5 25.48,124.97 FB5.2
N$63
  L1-TOP 0.4: R30.1 LED5.A
N$64
  L1-TOP 0.6: J5.1 19.6,123.4 18.5,124.5 9,124.5 7.5,126 7.5,131.5 7.5,132 5.93,133.57 CN7.B
N$66  (3 unrouted)
N$67  (5 unrouted)
N$68  (2 unrouted)
N$69  (1 unrouted)
N$70  (2 unrouted)
N$71  (2 unrouted)
N$72
  L1-TOP 0.2: J4.2 19.23,131.23 19,131 18.87,130.87 CN7.D
N$73  (3 unrouted)
N$74  (4 unrouted)
N$75  (3 unrouted)
N$76
  L1-TOP 0.2: D2.C 9.1,98.1 10,99 10.14,99.14 CN6.C 11.78,100.28 12.5,101 12.5,106 11.5,107 11.5,115 14,117.5 20,117.5 23,114.5 23.05,114.45 FB2.1
N$77
  L1-TOP 0.3: SP9.1 140.5,153 143.5,156 143.97,156.47 FB3.1
  L1-TOP 1: CN5.1 154.93,143.93 158,147 158,155 157,156 156.66,156.34 D3.C 154.17,158.4 C25.1 145.9,158.4 145.5,158 145,157.5 FB3.1
N$78  (3 unrouted)
N$79  (1 unrouted)
N$80  (1 unrouted)
  L1-TOP 0.3: U14.3 42.5,88 43,88.5 43,89 44.5,90.5 44.5,92.1
N$81  (via drill 0.8 pad 1.67)  (1 unrouted)
  L1-TOP 1.8: v133.5,150 v133.5,152 v133.5,154 133.8,154.3 D4.C
  L3-VDD 1.6: SW5.4 15.5,150 15.5,148.5 41.15,148.5 41.15,157.5 121.5,157.5 121.5,153 124.5,150 v133.5,150
  L3-VDD 1.8: v133.5,150 v133.5,152 v133.5,154
N$82  (2 unrouted)
N$83  (4 unrouted)
N$84  (2 unrouted)
N$85  (2 unrouted)
N$86  (1 unrouted)
N$87  (via drill 0.4 pad 0.8)  (1 unrouted)
  L1-TOP 0.2: R35.2 41.45,116.05 v42,115.5 | U7.3 48.95,113.95 50,115 50.5,115 v51,115.5 51.55,116.05 R37.1
  L2-BOTTOM 0.2: 46.5,115 47,115 | v51,115.5 50.5,115 43,115 42.5,115 v42,115.5
N$88  (2 unrouted)
N$89  (1 unrouted)
N$90  (1 unrouted)
N$91  (3 unrouted)
N$92  (5 unrouted)
N$93  (2 unrouted)
N$94  (1 unrouted)
N$95  (4 unrouted)
N$96  (2 unrouted)
N$97  (1 unrouted)
N$98  (2 unrouted)
N$99  (1 unrouted)
N$100  (2 unrouted)
N$101  (2 unrouted)
N$102  (4 unrouted)
N$103  (3 unrouted)
N$104  (3 unrouted)
N$105  (2 unrouted)
N$106  (2 unrouted)
N$107  (2 unrouted)
N$108  (1 unrouted)
N$109  (1 unrouted)
N$110
  L1-TOP 1: U6.3 95.69,151.31 96,151 FB20.2 97.53,149.2 99,149.2 99.4,149.2 C137.1 99.4,145.6 100,145 C26.1
N$111  (2 unrouted)
N$112  (2 unrouted)
N$113
  L1-TOP 0.6: R92.1 272.05,48.95 C99.1
N$114  (2 unrouted)
N$115  (2 unrouted)
N$116  (2 unrouted)
N$117  (2 unrouted)
N$118  (2 unrouted)
N$119
  L1-TOP 0.3: C111.1 37.5,79 39,77.5 43,77.5 43.5,78 U15.2 43.5,81 40.96,83.54 U15.6
  L1-TOP 0.4: C111.1 36.48,79.08 FB13.2
N$120  (via drill 0.4 pad 0.8)
  L1-TOP 0.3: FB14.2 v38,88 | U14.7 43.2,87.5 v42.9,87.2
  L1-TOP 0.4: C113.1 36.48,85.08 FB14.2
  L2-BOTTOM 0.3: v42.9,87.2 42.1,88 v38,88
N$121
  L1-TOP 0.3: U14.9 48,88.5 48.5,88.5 49.5,87.5 49.5,85.5 50.5,84.5 R96.2
N$122
  L1-TOP 0.3: U14.6 45.5,87 45.9,86.6 46.8,86.6 47.1,86.9 48.1,86.9 48.5,86.5 48.5,83.5 50,82 R97.2
N$123
  L1-TOP 0.3: U15.4 47.4,83.6 49.5,81.5 49.5,80.5 50.5,79.5 R98.2
N$124
  L1-TOP 0.3: R100.2 51,87 50.5,87.5 49,89 | 49,89 U14.10 | R99.2 50.5,92 49.5,91 49.5,89.5 49,89
N$125  (2 unrouted)
N$126  (3 unrouted)
N$127
  L1-TOP 0.25: LED8.A 106.85,140.7 arc90 R44.1
N$128  (2 unrouted)
N$129  (via drill 0.5 pad 0.8)
  other vias: 73,146.5
N$130  (3 unrouted)
N$131  (1 unrouted)
N$132
  L1-TOP 0.2: LED6.A 87.25,139.75 87,140 R34.1
N$133  (1 unrouted)
N$134
  L1-TOP 0.2: LED10.A 27,142 26.95,142.05 R55.1
N$135  (3 unrouted)
N$136  (3 unrouted)
N$137  (3 unrouted)
N$138
  L1-TOP 0.2: LED7.A 1.55,144.5 R40.1
N$139  (via drill 0.5 pad 0.8)
  other vias: 70,148
N$140  (4 unrouted)
N$141  (3 unrouted)
N$142  (2 unrouted)
N$143  (2 unrouted)
N$144  (2 unrouted)
N$145  (4 unrouted)
N$146  (3 unrouted)
N$147  (2 unrouted)
N$148  (2 unrouted)
N$149  (3 unrouted)
N$150
  L1-TOP 0.8: R41.1 22.5,147 21,147
  L1-TOP 1.27: SW5.3 SW5.6 SW5.5 SW5.2 13,147 21,147
N$151  (2 unrouted)
N$152  (1 unrouted)
N$153  (3 unrouted)
N$154  (1 unrouted)
N$155  (via drill 0.5 pad 0.8)
  other vias: 71.5,148
N$156  (2 unrouted)
N$157  (2 unrouted)
N$158  (3 unrouted)
N$159  (via drill 0.5 pad 0.8)
  other vias: 73,148
N$160  (via drill 0.5 pad 0.8)
  other vias: 73,145
N$161  (via drill 0.5 pad 0.8)
  other vias: 71.5,145
N$162  (via drill 0.5 pad 0.8)
  other vias: 70,145
N$169
  L1-TOP 0.5: C49.1 48.41,146.1 U9.1
N$170
  L1-TOP 0.5: U9.5 44.59,138.5 44.5,138.5
  pour L1-TOP (isolate 0.3): 35,139.3 35,137.6 45.2,137.6 45.2,139.3
N$171
  L1-TOP 0.25: U9.8 48.41,139.09 48.5,139 48.6,138.9 48.9,138.6 C47.1
N$172
  L1-TOP 0.25: U9.6 45.87,138.13 46,138 47,137 47.2,136.8 55.9,136.8 56.9,136.8
  L1-TOP 0.3: C46.1 57.5,137.4 56.9,136.8
N$173
  L1-TOP 0.25: U9.7 47.13,138.37 47.5,138 47.8,137.7 48,137.5 54,137.5 54.5,138 R43.2
NRST  (4 unrouted)
NSS  (1 unrouted)
OSC_IN  (2 unrouted)
OSC_OUT  (1 unrouted)
OTG_DM  (2 unrouted)
OTG_DP  (2 unrouted)
OTG_ID  (1 unrouted)
OTG_OVR_CUR  (2 unrouted)
OTG_PWR_ON  (1 unrouted)
PA_OUTPUT  (1 unrouted)
PE0  (1 unrouted)
PE1  (1 unrouted)
PE2  (1 unrouted)
PE3  (1 unrouted)
RX+12V  (3 unrouted)
RX-2ND-LO  (1 unrouted)
  L1-TOP 0.4: SP8.1 R100.1 53.45,87.05 52.5,88 51.55,88.95 R102.1
SCK  (1 unrouted)
SCL3  (via drill 0.4 pad 0.8)  (3 unrouted)
  L1-TOP 0.3: U14.4 41.5,87.5 43,86 v47.5,86 | U15.8 47.5,81.5 48,81.5 v48.5,81
  L2-BOTTOM 0.3: v47.5,86 48,85.5 48,82.5 48,81.5 v48.5,81
SDA3  (3 unrouted)
  L1-TOP 0.3: U15.7 39,81.5 38.5,82 38.5,86.5 39,87 U14.5
SW  (via drill 0.6 pad 1)  (1 unrouted)
  L1-TOP 0.5: U9.3 45.87,148.24 45.5,148.6 | v51,149.5 C49.2
  L2-BOTTOM 1: v51,149.5 45.5,149.5 v45,150
  L2-BOTTOM 1.6: v39,155.5 v39,157.5 | 45,149 v45,150 45,151 v43.5,151 v43.5,149
  other vias: 39,151.5 39,153.5
  pour L1-TOP (isolate 0.3, rank 3): 33.8,158.5 33.8,146.5 39.9,146.5 39.9,158.5
  pour L1-TOP (isolate 0.3): 42.5,152 46.1,152 46.1,148 42.5,148
  pour L3-VDD (isolate 0.3): 1.5,158.5 40.5,158.5 40.5,152 46,152 46,147.5 42,147.5 42,136 1.5,136
SWCLK  (1 unrouted)
SWDIO  (1 unrouted)
TIA_OUT  (2 unrouted)
TIAIN  (2 unrouted)
TIAOUT  (1 unrouted)
TX+12V  (5 unrouted)
TX-2ND-LO  (1 unrouted)
  L1-TOP 0.4: SP7.1 R99.1 51.55,93.9 R101.1
TX_DAC  (2 unrouted)
USART3_RX  (2 unrouted)
USART3_TX  (2 unrouted)
VBAT  (2 unrouted)
VBUS  (4 unrouted)
VDDA  (4 unrouted)
VGG  (3 unrouted)
VGG_DAC  (1 unrouted)
VREF+  (3 unrouted)

## Text on the board
tPlace: +9V | OTG USB INTERFACE | +5V | 3V3 | A3V3 | SPEAKER AMP | MIC | BASEBAND AMP | RX+12V | TX+12V | MIC PREAMP | CPU | EXT MIC | LOCAL OSCILLATOR | BACK | SELECT | TIA | POWER | XTAL 2ND MIXER | PTT | SYNC | CLIP/ / ERROR | PTT | EXT / PTT | DRIVER_PA | 1st_MIXER_BPF_SWITCH